# Altium PCB ISC.PcbDoc (part 3 of 3)
Units mm, origin at the board's own origin, x right, y up, seen from the top; angles counter-clockwise.
Board outline 152.4 x 101.6 mm, 2 copper layers (Top Layer, Bottom Layer); 689 components, 715 nets, 2378 pads, 0 vias.
Unrouted connection lines stored in the file: 1379.
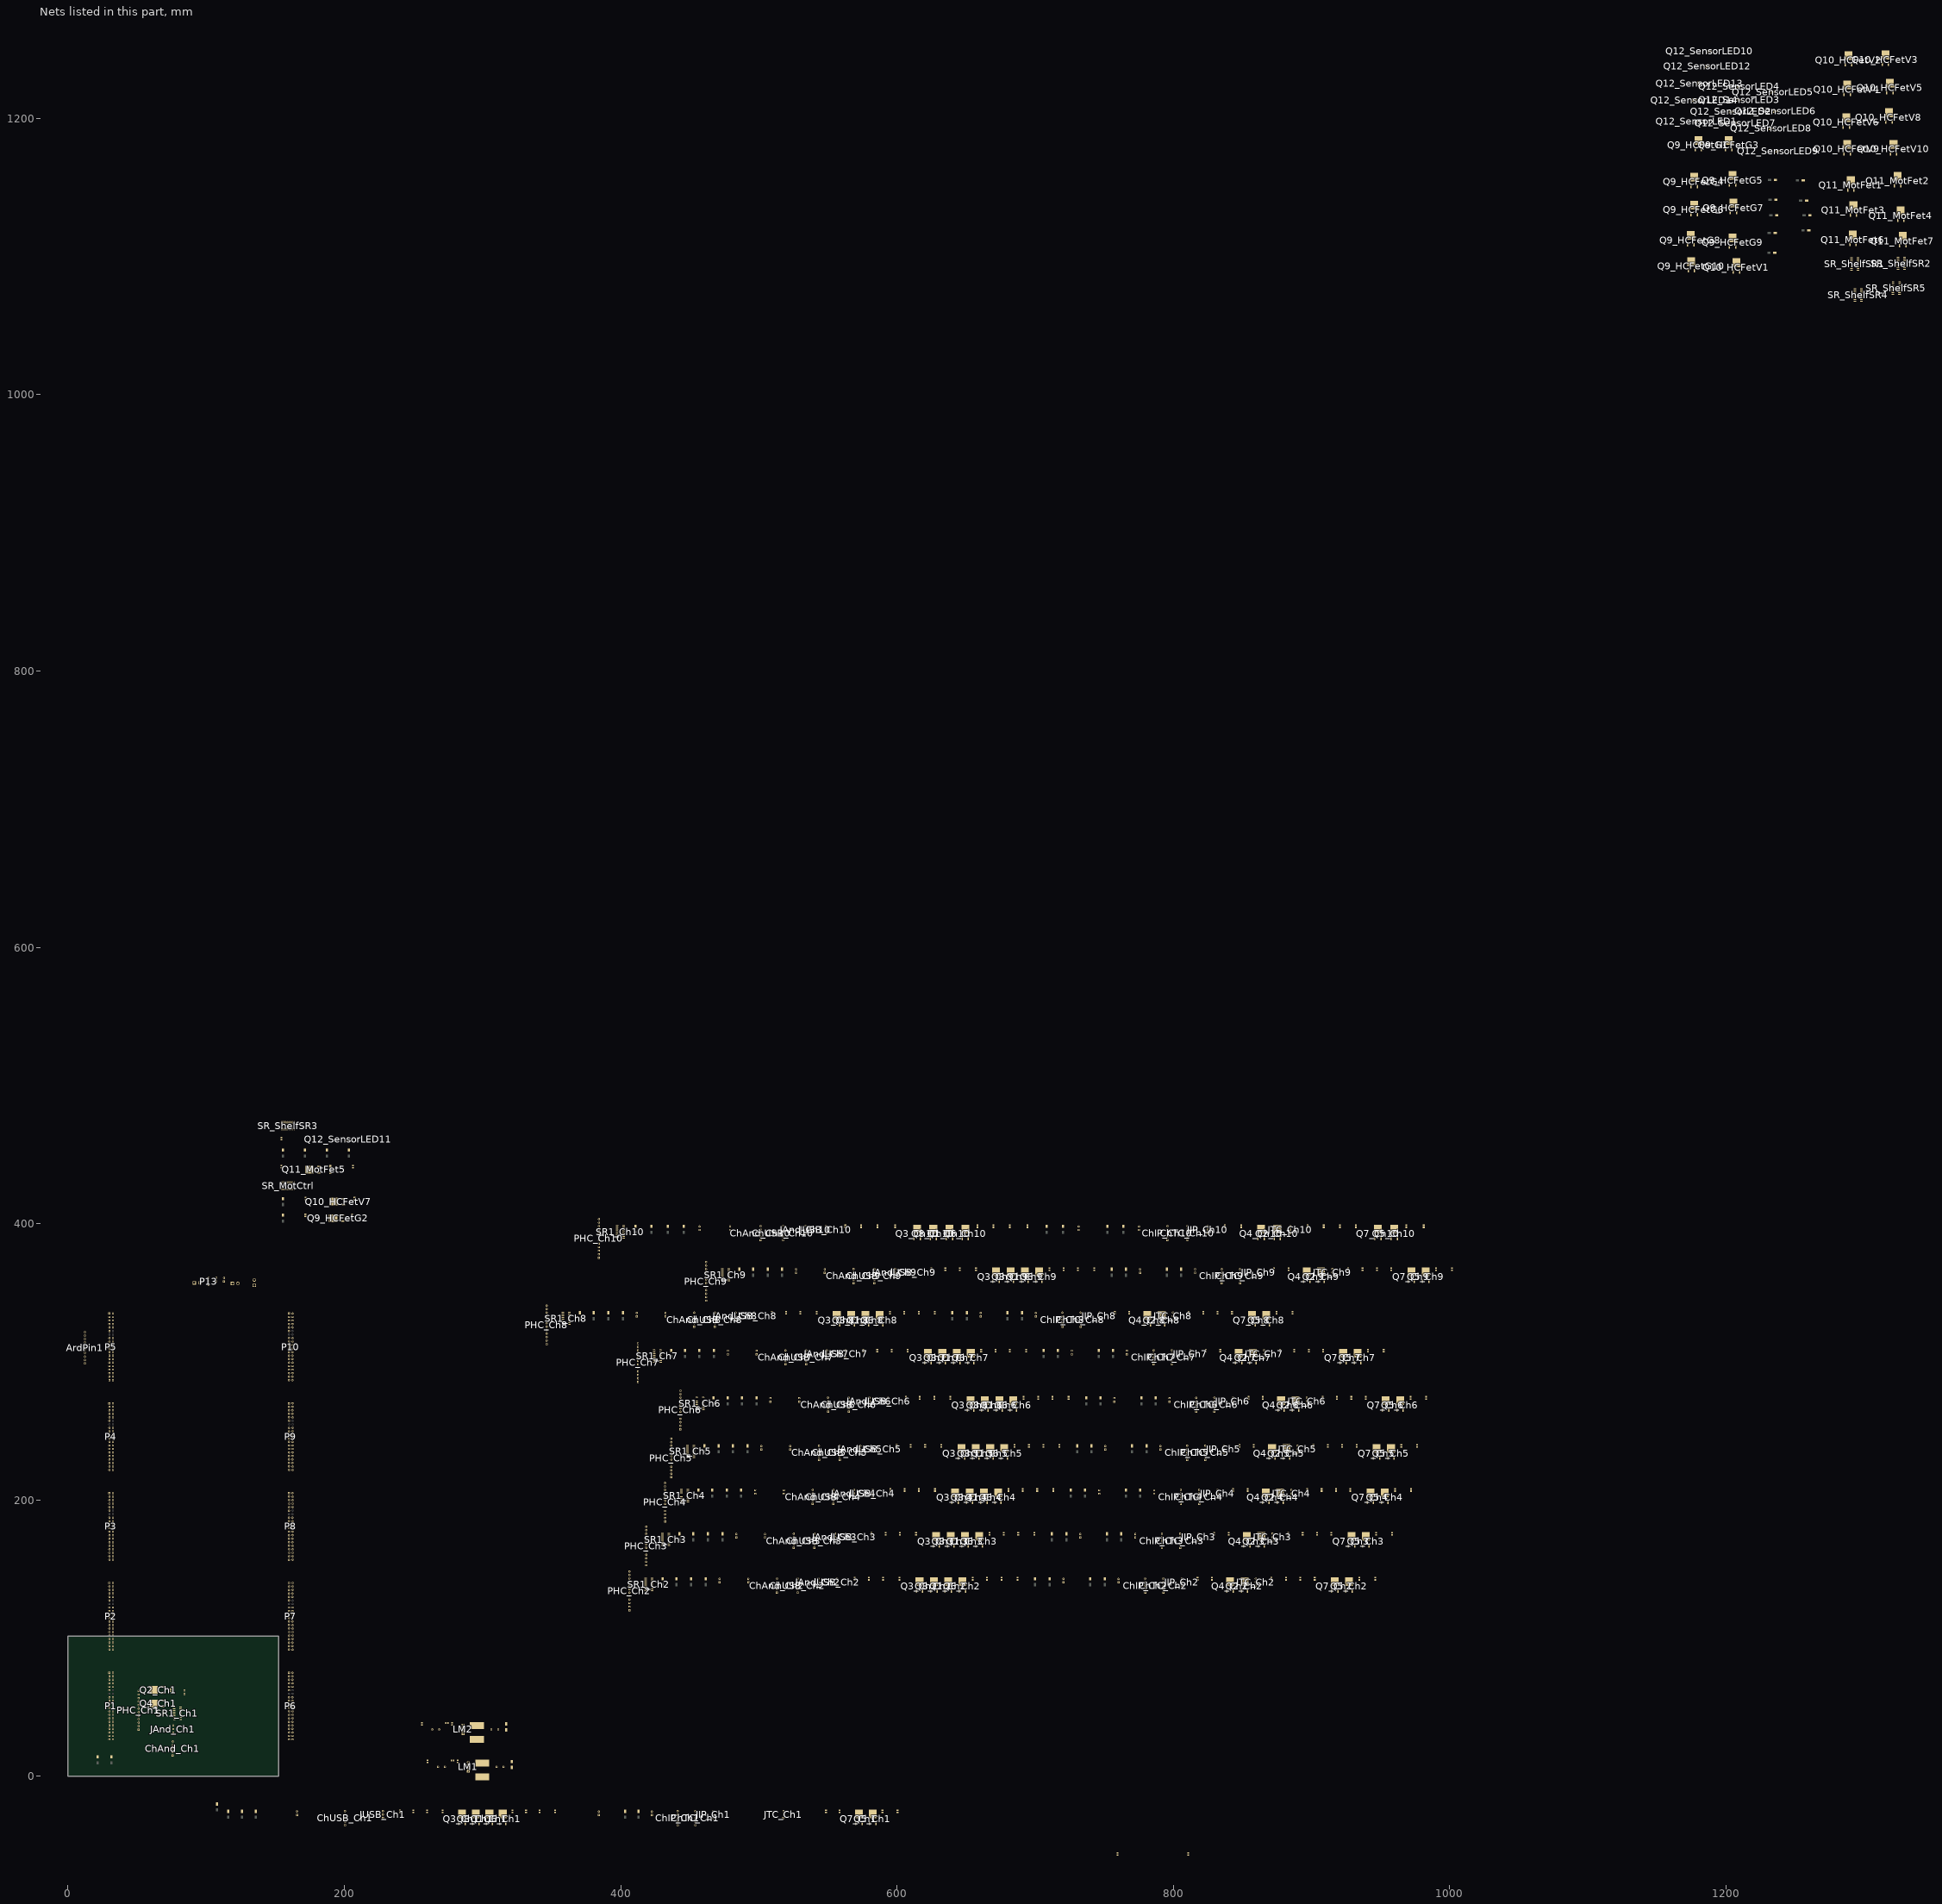
[diagram p3: the nets of this part, all layers, seen from the top]

## Part data
5VSupply 12VSupply: "3.96 EP HDR ASSY 2P_GREEN_", Package=None, Availability=Unavailable, Centerline_Pitch="3.96 mm[.156 in]", EU_RoHS_Compliance=Compliant, MF="TE Connectivity", MP=6-1123723-2, Number_of_Positions=2, Price=None, Product_Type=Header, SnapEDA_Link=https://www.snapeda.com/parts/6-1123723-2/TE%20Connectivity%20AMP%20Connectors/view-part/?ref=snap, TE_purchase_URL=https://www.te.com/usa-en/product-6-1123723-2.html?te_bu=Cor&te_type=disp&te_campaign=seda_glo_cor-seda-global-disp-prtnr-fy19-seda-model-bom-cta_sma-317_1&elqCampaignId=32493
ACSout1: library part 6-1123723-2, "3.96 EP HDR ASSY 2P_GREEN_", Package=None, Availability=Unavailable, Centerline_Pitch="3.96 mm[.156 in]", EU_RoHS_Compliance=Compliant, MF="TE Connectivity", MP=6-1123723-2, Number_of_Positions=2, Price=None, Product_Type=Header, SnapEDA_Link=https://www.snapeda.com/parts/6-1123723-2/TE%20Connectivity%20AMP%20Connectors/view-part/?ref=snap, TE_purchase_URL=https://www.te.com/usa-en/product-6-1123723-2.html?te_bu=Cor&te_type=disp&te_campaign=seda_glo_cor-seda-global-disp-prtnr-fy19-seda-model-bom-cta_sma-317_1&elqCampaignId=32493
ArdPin1: "Header, 10-Pin", LatestRevisionDate=17-Jul-2002, LatestRevisionNote="Re-released for DXP Platform.", Publisher="Altium Limited"
C1 C2 C4 C5: library part CAP, ="Cap 7.6mm"
C3 C6: library part "CAP NON", ="Cap non 2.54mm"
ChAnd_Ch1 ChAnd_Ch2 ChAnd_Ch3 ChAnd_Ch4 ChAnd_Ch5 ChAnd_Ch6 ChAnd_Ch7 ChAnd_Ch8 ChAnd_Ch9 ChAnd_Ch10 ChIP_Ch1 ChIP_Ch2 ChIP_Ch3 ChIP_Ch4 ChIP_Ch5 ChIP_Ch6 ChIP_Ch7 ChIP_Ch8 ChIP_Ch9 ChIP_Ch10 ChTC_Ch1 ChTC_Ch2 ChTC_Ch3 ChTC_Ch4 ChTC_Ch5 ChTC_Ch6 ChTC_Ch7 ChTC_Ch8 ChTC_Ch9 ChTC_Ch10 ChUSB_Ch1 ChUSB_Ch2 ChUSB_Ch3 ChUSB_Ch4 ChUSB_Ch5 ChUSB_Ch6 ChUSB_Ch7 ChUSB_Ch8 ChUSB_Ch9 ChUSB_Ch10: "жСжПн ЗТ ФЗСЋС ЗдПСжннП", LatestRevisionDate=17-Jul-2002, LatestRevisionNote="Re-released for DXP Platform.", Publisher="Altium Limited"
D1_Ch1 D1_Ch2 D1_Ch3 D1_Ch4 D1_Ch5 D1_Ch6 D1_Ch7 D1_Ch8 D1_Ch9 D1_Ch10 D2_Ch1 D2_Ch2 D2_Ch3 D2_Ch4 D2_Ch5 D2_Ch6 D2_Ch7 D2_Ch8 D2_Ch9 D2_Ch10 D3_Ch1 D3_Ch2 D3_Ch3 D3_Ch4 D3_Ch5 D3_Ch6 D3_Ch7 D3_Ch8 D3_Ch9 D3_Ch10 D4_Ch1 D4_Ch2 D4_Ch3 D4_Ch4 D4_Ch5 D4_Ch6 D4_Ch7 D4_Ch8 D4_Ch9 D4_Ch10 D5_Ch1 D5_Ch2 D5_Ch3 D5_Ch4 D5_Ch5 D5_Ch6 D5_Ch7 D5_Ch8 D5_Ch9 D5_Ch10 D6_Ch1 D6_Ch2 D6_Ch3 D6_Ch4 D6_Ch5 D6_Ch6 D6_Ch7 D6_Ch8 D6_Ch9 D6_Ch10 D7_Ch1 D7_Ch2 D7_Ch3 D7_Ch4 D7_Ch5 D7_Ch6 D7_Ch7 D7_Ch8 D7_Ch9 D7_Ch10 D8_Ch1 D8_Ch2 D8_Ch3 D8_Ch4 D8_Ch5 D8_Ch6 D8_Ch7 D8_Ch8 D8_Ch9 D8_Ch10 D11_HCFetG1 D11_HCFetG2 D11_HCFetG3 D11_HCFetG4 D11_HCFetG5 D11_HCFetG6 D11_HCFetG7 D11_HCFetG8 D11_HCFetG9 D11_HCFetG10 D12_HCFetV1 D12_HCFetV2 D12_HCFetV3 D12_HCFetV4 D12_HCFetV5 D12_HCFetV6 D12_HCFetV7 D12_HCFetV8 D12_HCFetV9 D12_HCFetV10 D14_SenIn1 D14_SenIn2 D14_SenIn3 D14_SenIn4 D14_SenIn5 D14_SenIn6 D14_SenIn7 D14_SenIn8 D14_SenIn9 D14_SenIn10 D15_SenIn1 D15_SenIn2 D15_SenIn3 D15_SenIn4 D15_SenIn5 D15_SenIn6 D15_SenIn7 D15_SenIn8 D15_SenIn9 D15_SenIn10 D16_SenIn1 D16_SenIn2 D16_SenIn3 D16_SenIn4 D16_SenIn5 D16_SenIn6 D16_SenIn7 D16_SenIn8 D16_SenIn9 D16_SenIn10 D17_SenIn1 D17_SenIn2 D17_SenIn3 D17_SenIn4 D17_SenIn5 D17_SenIn6 D17_SenIn7 D17_SenIn8 D17_SenIn9 D17_SenIn10: library part STPS2L60A, "SCHOTTKY RECTIFIER 2A; Voltage Vrrm: 60V; Diode Case Style: DO-214AC; Case Style: DO-214AC", Package="DO-214 STMicroelectronics", Availability=Unavailable, MF=STMicroelectronics, MP=STPS2L60A, Price=None, SnapEDA_Link=https://www.snapeda.com/parts/STPS2L60A/STMicroelectronics/view-part/?ref=snap
D9 D10 D13_MotFet1 D13_MotFet2 D13_MotFet3 D13_MotFet4 D13_MotFet5 D13_MotFet6 D13_MotFet7: "S1 Series 1000 V 1 A 1 uA Surface Mount General Purpose Rectifier - DO-214AC", Package="DO-214AC-214 ON Semiconductor", Availability=Unavailable, MF="ON Semiconductor", MP=S1M, Price=None, SnapEDA_Link=https://www.snapeda.com/parts/S1M/ON%20Semiconductor/view-part/?ref=snap
JAnd_Ch1 JAnd_Ch2 JAnd_Ch3 JAnd_Ch4 JAnd_Ch5 JAnd_Ch6 JAnd_Ch7 JAnd_Ch8 JAnd_Ch9 JAnd_Ch10 JIP_Ch1 JIP_Ch2 JIP_Ch3 JIP_Ch4 JIP_Ch5 JIP_Ch6 JIP_Ch7 JIP_Ch8 JIP_Ch9 JIP_Ch10 JTC_Ch1 JTC_Ch2 JTC_Ch3 JTC_Ch4 JTC_Ch5 JTC_Ch6 JTC_Ch7 JTC_Ch8 JTC_Ch9 JTC_Ch10 JUSB_Ch1 JUSB_Ch2 JUSB_Ch3 JUSB_Ch4 JUSB_Ch5 JUSB_Ch6 JUSB_Ch7 JUSB_Ch8 JUSB_Ch9 JUSB_Ch10: "МЗгЃС ЗдКОЗИ Инд 5 ЛЗИК ОСжМн (гдИЪ КЫРне ЛЗИК) нЗ ЗдКОЗИ ОСжМн ФЗСЋС ИСЗн ЮЭУе", LatestRevisionDate=17-Jul-2002, LatestRevisionNote="Re-released for DXP Platform.", Publisher="Altium Limited"
L1 L2: library part Inductor, "Inductor", ="Inductor 26.8mm"
LM1 LM2: library part MOSFET-N3, "Two-Gate, N-Channel MOSFET, Externally Terminated Substrate", Code_JEDEC=TS-001-AA, LatestRevisionDate=17-Jul-2002, LatestRevisionNote="Re-released for DXP Platform.", PackageDescription="TO-220, Molded, 5 Lead, Straight", PackageReference=T05A, Published=24-Mar-1999, Publisher="Altium Limited"
optSupAnd_Ch1 optSupAnd_Ch2 optSupAnd_Ch3 optSupAnd_Ch4 optSupAnd_Ch5 optSupAnd_Ch6 optSupAnd_Ch7 optSupAnd_Ch8 optSupAnd_Ch9 optSupAnd_Ch10 optSupIP_Ch1 optSupIP_Ch2 optSupIP_Ch3 optSupIP_Ch4 optSupIP_Ch5 optSupIP_Ch6 optSupIP_Ch7 optSupIP_Ch8 optSupIP_Ch9 optSupIP_Ch10 optSupTC_Ch1 optSupTC_Ch2 optSupTC_Ch3 optSupTC_Ch4 optSupTC_Ch5 optSupTC_Ch6 optSupTC_Ch7 optSupTC_Ch8 optSupTC_Ch9 optSupTC_Ch10 optSupUSB_Ch1 optSupUSB_Ch2 optSupUSB_Ch3 optSupUSB_Ch4 optSupUSB_Ch5 optSupUSB_Ch6 optSupUSB_Ch7 optSupUSB_Ch8 optSupUSB_Ch9 optSupUSB_Ch10: "ЗђС ФЗСЋС жСжПн 12 жбК ПЗФКе ИЗФП Знд МЗгЃС 12 жбК ИЗнУКн жХб ФжП", LatestRevisionDate=17-Jul-2002, LatestRevisionNote="Re-released for DXP Platform.", Publisher="Altium Limited"
P1 P2 P3 P4 P5 P6 P7 P8 P9 P10: "Header, 20-Pin, Dual row", LatestRevisionDate=17-Jul-2002, LatestRevisionNote="Re-released for DXP Platform.", Publisher="Altium Limited"
P11 P12: library part "Header 2", "Header, 2-Pin", LatestRevisionDate=17-Jul-2002, LatestRevisionNote="Re-released for DXP Platform.", Publisher="Altium Limited"
P13: library part "Header 3", "Header, 3-Pin", LatestRevisionDate=17-Jul-2002, LatestRevisionNote="Re-released for DXP Platform.", Publisher="Altium Limited"
PHC_Ch1 PHC_Ch2 PHC_Ch3 PHC_Ch4 PHC_Ch5 PHC_Ch6 PHC_Ch7 PHC_Ch8 PHC_Ch9 PHC_Ch10: "Header, 12-Pin", LatestRevisionDate=17-Jul-2002, LatestRevisionNote="Re-released for DXP Platform.", Publisher="Altium Limited"
Q1_Ch1 Q1_Ch2 Q1_Ch3 Q1_Ch4 Q1_Ch5 Q1_Ch6 Q1_Ch7 Q1_Ch8 Q1_Ch9 Q1_Ch10 Q2_Ch1 Q2_Ch2 Q2_Ch3 Q2_Ch4 Q2_Ch5 Q2_Ch6 Q2_Ch7 Q2_Ch8 Q2_Ch9 Q2_Ch10 Q3_Ch1 Q3_Ch2 Q3_Ch3 Q3_Ch4 Q3_Ch5 Q3_Ch6 Q3_Ch7 Q3_Ch8 Q3_Ch9 Q3_Ch10 Q4_Ch1 Q4_Ch2 Q4_Ch3 Q4_Ch4 Q4_Ch5 Q4_Ch6 Q4_Ch7 Q4_Ch8 Q4_Ch9 Q4_Ch10 Q5_Ch1 Q5_Ch2 Q5_Ch3 Q5_Ch4 Q5_Ch5 Q5_Ch6 Q5_Ch7 Q5_Ch8 Q5_Ch9 Q5_Ch10 Q6_Ch1 Q6_Ch2 Q6_Ch3 Q6_Ch4 Q6_Ch5 Q6_Ch6 Q6_Ch7 Q6_Ch8 Q6_Ch9 Q6_Ch10 Q7_Ch1 Q7_Ch2 Q7_Ch3 Q7_Ch4 Q7_Ch5 Q7_Ch6 Q7_Ch7 Q7_Ch8 Q7_Ch9 Q7_Ch10 Q8_Ch1 Q8_Ch2 Q8_Ch3 Q8_Ch4 Q8_Ch5 Q8_Ch6 Q8_Ch7 Q8_Ch8 Q8_Ch9 Q8_Ch10 Q9_HCFetG1 Q9_HCFetG2 Q9_HCFetG3 Q9_HCFetG4 Q9_HCFetG5 Q9_HCFetG6 Q9_HCFetG7 Q9_HCFetG8 Q9_HCFetG9 Q9_HCFetG10 Q10_HCFetV1 Q10_HCFetV2 Q10_HCFetV3 Q10_HCFetV4 Q10_HCFetV5 Q10_HCFetV6 Q10_HCFetV7 Q10_HCFetV8 Q10_HCFetV9 Q10_HCFetV10 Q11_MotFet1 Q11_MotFet2 Q11_MotFet3 Q11_MotFet4 Q11_MotFet5 Q11_MotFet6 Q11_MotFet7: library part IPD50P04P4L-11, "P-Channel 40 V 10.6 mOhm OptiMOS®-P2 Power-Transistor -PG-TO-252-3", Package="TO-252-3 Infineon", Availability=Unavailable, MF="Infineon Technologies", MP=IPD50P04P4L-11, Price=None, SnapEDA_Link=https://www.snapeda.com/parts/IPD50P04P4L-11/Infineon%20Technologies/view-part/?ref=snap
Q12_SensorLED1 Q12_SensorLED2 Q12_SensorLED3 Q12_SensorLED4 Q12_SensorLED5 Q12_SensorLED6 Q12_SensorLED7 Q12_SensorLED8 Q12_SensorLED9 Q12_SensorLED10 Q12_SensorLED11 Q12_SensorLED12 Q12_SensorLED13 Q12_SensorLED14: library part MOSFET-P, "P-Channel MOSFET", LatestRevisionDate=17-Jul-2002, LatestRevisionNote="Re-released for DXP Platform.", PackageDescription="TO, Flat Index; 3 In-Line, Axial Leads; Body Dia. 4.6mm; Lead Dia. 0.5 mm (max)", PackageReference=E3, PackageVersion=1995/1996, Published=8-Jun-2000, Publisher="Altium Limited"
R1_Ch1 R1_Ch2 R1_Ch3 R1_Ch4 R1_Ch5 R1_Ch6 R1_Ch7 R1_Ch8 R1_Ch9 R1_Ch10 R2_Ch1 R2_Ch2 R2_Ch3 R2_Ch4 R2_Ch5 R2_Ch6 R2_Ch7 R2_Ch8 R2_Ch9 R2_Ch10 R3_Ch1 R3_Ch2 R3_Ch3 R3_Ch4 R3_Ch5 R3_Ch6 R3_Ch7 R3_Ch8 R3_Ch9 R3_Ch10 R4_Ch1 R4_Ch2 R4_Ch3 R4_Ch4 R4_Ch5 R4_Ch6 R4_Ch7 R4_Ch8 R4_Ch9 R4_Ch10 R5_Ch1 R5_Ch2 R5_Ch3 R5_Ch4 R5_Ch5 R5_Ch6 R5_Ch7 R5_Ch8 R5_Ch9 R5_Ch10 R6_Ch1 R6_Ch2 R6_Ch3 R6_Ch4 R6_Ch5 R6_Ch6 R6_Ch7 R6_Ch8 R6_Ch9 R6_Ch10 R7_Ch1 R7_Ch2 R7_Ch3 R7_Ch4 R7_Ch5 R7_Ch6 R7_Ch7 R7_Ch8 R7_Ch9 R7_Ch10 R8_Ch1 R8_Ch2 R8_Ch3 R8_Ch4 R8_Ch5 R8_Ch6 R8_Ch7 R8_Ch8 R8_Ch9 R8_Ch10 R9_Ch1 R9_Ch2 R9_Ch3 R9_Ch4 R9_Ch5 R9_Ch6 R9_Ch7 R9_Ch8 R9_Ch9 R9_Ch10 R10_Ch1 R10_Ch2 R10_Ch3 R10_Ch4 R10_Ch5 R10_Ch6 R10_Ch7 R10_Ch8 R10_Ch9 R10_Ch10 R11_Ch1 R11_Ch2 R11_Ch3 R11_Ch4 R11_Ch5 R11_Ch6 R11_Ch7 R11_Ch8 R11_Ch9 R11_Ch10 R12_Ch1 R12_Ch2 R12_Ch3 R12_Ch4 R12_Ch5 R12_Ch6 R12_Ch7 R12_Ch8 R12_Ch9 R12_Ch10 R13_Ch1 R13_Ch2 R13_Ch3 R13_Ch4 R13_Ch5 R13_Ch6 R13_Ch7 R13_Ch8 R13_Ch9 R13_Ch10 R14_Ch1 R14_Ch2 R14_Ch3 R14_Ch4 R14_Ch5 R14_Ch6 R14_Ch7 R14_Ch8 R14_Ch9 R14_Ch10 R15_Ch1 R15_Ch2 R15_Ch3 R15_Ch4 R15_Ch5 R15_Ch6 R15_Ch7 R15_Ch8 R15_Ch9 R15_Ch10 R16_Ch1 R16_Ch2 R16_Ch3 R16_Ch4 R16_Ch5 R16_Ch6 R16_Ch7 R16_Ch8 R16_Ch9 R16_Ch10 R21_HCFetG1 R21_HCFetG2 R21_HCFetG3 R21_HCFetG4 R21_HCFetG5 R21_HCFetG6 R21_HCFetG7 R21_HCFetG8 R21_HCFetG9 R21_HCFetG10 R22_HCFetG1 R22_HCFetG2 R22_HCFetG3 R22_HCFetG4 R22_HCFetG5 R22_HCFetG6 R22_HCFetG7 R22_HCFetG8 R22_HCFetG9 R22_HCFetG10 R23_HCFetV1 R23_HCFetV2 R23_HCFetV3 R23_HCFetV4 R23_HCFetV5 R23_HCFetV6 R23_HCFetV7 R23_HCFetV8 R23_HCFetV9 R23_HCFetV10 R24_HCFetV1 R24_HCFetV2 R24_HCFetV3 R24_HCFetV4 R24_HCFetV5 R24_HCFetV6 R24_HCFetV7 R24_HCFetV8 R24_HCFetV9 R24_HCFetV10 R25_MotFet1 R25_MotFet2 R25_MotFet3 R25_MotFet4 R25_MotFet5 R25_MotFet6 R25_MotFet7 R26_MotFet1 R26_MotFet2 R26_MotFet3 R26_MotFet4 R26_MotFet5 R26_MotFet6 R26_MotFet7 R27_SensorLED1 R27_SensorLED2 R27_SensorLED3 R27_SensorLED4 R27_SensorLED5 R27_SensorLED6 R27_SensorLED7 R27_SensorLED8 R27_SensorLED9 R27_SensorLED10 R27_SensorLED11 R27_SensorLED12 R27_SensorLED13 R27_SensorLED14 R28_SensorLED1 R28_SensorLED2 R28_SensorLED3 R28_SensorLED4 R28_SensorLED5 R28_SensorLED6 R28_SensorLED7 R28_SensorLED8 R28_SensorLED9 R28_SensorLED10 R28_SensorLED11 R28_SensorLED12 R28_SensorLED13 R28_SensorLED14: library part Res1, "Resistor", LatestRevisionDate=17-Jul-2002, LatestRevisionNote="Re-released for DXP Platform.", PackageDescription="Axial Device, Thru-Hole; 2 Leads; 0.3 in Pin Spacing", PackageReference=AXIAL-0.3, Published=8-Jun-2000, Publisher="Altium Limited"
R17 R18 R19 R20: library part RESISTOR, ="Res 0603"
SR1_Ch1 SR1_Ch2 SR1_Ch3 SR1_Ch4 SR1_Ch5 SR1_Ch6 SR1_Ch7 SR1_Ch8 SR1_Ch9 SR1_Ch10 SR_MotCtrl SR_ShelfSR1 SR_ShelfSR2 SR_ShelfSR3 SR_ShelfSR4 SR_ShelfSR5: library part "Res Pack3", "Isolated Resistor Network", Code_IPC=SOIC127P600-16, Code_JEDEC=MS-012-AC, LatestRevisionDate=29-May-2009, LatestRevisionNote="IPC-7351 Footprint Added.", PackageDescription="16-Pin Small Outline Integrated Circuit 1.27 mm Pitch", PackageReference=SO-16, Published=24-Mar-1999, Publisher="Altium Limited"

## Nets (pads, with @x,y where several pads share a name; then routed paths per layer and width w, separated by ;. In a path a pad name is that pad's centre, name@x,y a point inside that pad or via, vN(x,y) a via of type N, cw(c..) or ccw(c..) an arc to the next point about the centre after c; other vN are vias at no path point)
2V: C2.2 C3.2 L1.2 Q10_HCFetV1.3 Q10_HCFetV2.3 Q10_HCFetV3.3 Q10_HCFetV6.3 Q10_HCFetV7.3 Q10_HCFetV8.3 Q12_SensorLED1.2 Q12_SensorLED2.2 Q12_SensorLED3.2 Q12_SensorLED4.2 Q12_SensorLED5.2 Q12_SensorLED7.2 Q12_SensorLED8.2 Q12_SensorLED9.2 Q12_SensorLED10.2 Q12_SensorLED11.2 Q12_SensorLED12.2 Q12_SensorLED14.2 R18.1
3.3V: C5.2 C6.2 L2.2 Q12_SensorLED6.2 Q12_SensorLED13.2 R20.1
5V: 5VSupply.2 C1.1 C4.1 JAnd_Ch1.3 JAnd_Ch2.3 JAnd_Ch3.3 JAnd_Ch4.3 JAnd_Ch5.3 JAnd_Ch6.3 JAnd_Ch7.3 JAnd_Ch8.3 JAnd_Ch9.3 JAnd_Ch10.3 JIP_Ch1.3 JIP_Ch2.3 JIP_Ch3.3 JIP_Ch4.3 JIP_Ch5.3 JIP_Ch6.3 JIP_Ch7.3 JIP_Ch8.3 JIP_Ch9.3 JIP_Ch10.3 JTC_Ch1.3 JTC_Ch2.3 JTC_Ch3.3 JTC_Ch4.3 JTC_Ch5.3 JTC_Ch6.3 JTC_Ch7.3 JTC_Ch8.3 JTC_Ch9.3 JTC_Ch10.3 JUSB_Ch1.3 JUSB_Ch2.3 JUSB_Ch3.3 JUSB_Ch4.3 JUSB_Ch5.3 JUSB_Ch6.3 JUSB_Ch7.3 JUSB_Ch8.3 JUSB_Ch9.3 JUSB_Ch10.3 LM1.1 LM2.1 P11.2 P12.2 SR1_Ch1.10 SR1_Ch1.16 SR1_Ch2.10 SR1_Ch2.16 SR1_Ch3.10 SR1_Ch3.16 SR1_Ch4.10 SR1_Ch4.16 SR1_Ch5.10 SR1_Ch5.16 SR1_Ch6.10 SR1_Ch6.16 SR1_Ch7.10 SR1_Ch7.16 SR1_Ch8.10 SR1_Ch8.16 SR1_Ch9.10 SR1_Ch9.16 SR1_Ch10.10 SR1_Ch10.16 SR_MotCtrl.10 SR_MotCtrl.16 SR_ShelfSR1.10 SR_ShelfSR1.16 SR_ShelfSR2.10 SR_ShelfSR2.16 SR_ShelfSR3.10 SR_ShelfSR3.16 SR_ShelfSR4.10 SR_ShelfSR4.16 SR_ShelfSR5.10 SR_ShelfSR5.16
12V: 12VSupply.2 optSupAnd_Ch1.1 optSupAnd_Ch2.1 optSupAnd_Ch3.1 optSupAnd_Ch4.1 optSupAnd_Ch5.1 optSupAnd_Ch6.1 optSupAnd_Ch7.1 optSupAnd_Ch8.1 optSupAnd_Ch9.1 optSupAnd_Ch10.1 optSupIP_Ch1.1 optSupIP_Ch2.1 optSupIP_Ch3.1 optSupIP_Ch4.1 optSupIP_Ch5.1 optSupIP_Ch6.1 optSupIP_Ch7.1 optSupIP_Ch8.1 optSupIP_Ch9.1 optSupIP_Ch10.1 optSupTC_Ch1.1 optSupTC_Ch2.1 optSupTC_Ch3.1 optSupTC_Ch4.1 optSupTC_Ch5.1 optSupTC_Ch6.1 optSupTC_Ch7.1 optSupTC_Ch8.1 optSupTC_Ch9.1 optSupTC_Ch10.1 optSupUSB_Ch1.1 optSupUSB_Ch2.1 optSupUSB_Ch3.1 optSupUSB_Ch4.1 optSupUSB_Ch5.1 optSupUSB_Ch6.1 optSupUSB_Ch7.1 optSupUSB_Ch8.1 optSupUSB_Ch9.1 optSupUSB_Ch10.1 Q10_HCFetV4.3 Q10_HCFetV5.3 Q10_HCFetV9.3 Q10_HCFetV10.3
AndGND_Ch1: PHC_Ch1.1
AndGND_Ch2: PHC_Ch2.1
AndGND_Ch3: PHC_Ch3.1
AndGND_Ch4: PHC_Ch4.1
AndGND_Ch5: PHC_Ch5.1
AndGND_Ch6: PHC_Ch6.1
AndGND_Ch7: PHC_Ch7.1
AndGND_Ch8: PHC_Ch8.1
AndGND_Ch9: PHC_Ch9.1
AndGND_Ch10: PHC_Ch10.1
AndVCC_Ch1: JAnd_Ch1.2 PHC_Ch1.2
AndVCC_Ch2: JAnd_Ch2.2 PHC_Ch2.2
AndVCC_Ch3: JAnd_Ch3.2 PHC_Ch3.2
AndVCC_Ch4: JAnd_Ch4.2 PHC_Ch4.2
AndVCC_Ch5: JAnd_Ch5.2 PHC_Ch5.2
AndVCC_Ch6: JAnd_Ch6.2 PHC_Ch6.2
AndVCC_Ch7: JAnd_Ch7.2 PHC_Ch7.2
AndVCC_Ch8: JAnd_Ch8.2 PHC_Ch8.2
AndVCC_Ch9: JAnd_Ch9.2 PHC_Ch9.2
AndVCC_Ch10: JAnd_Ch10.2 PHC_Ch10.2
ChAndVCC_Ch1: ChAnd_Ch1.1 JAnd_Ch1.1
ChAndVCC_Ch2: ChAnd_Ch2.1 JAnd_Ch2.1
ChAndVCC_Ch3: ChAnd_Ch3.1 JAnd_Ch3.1
ChAndVCC_Ch4: ChAnd_Ch4.1 JAnd_Ch4.1
ChAndVCC_Ch5: ChAnd_Ch5.1 JAnd_Ch5.1
ChAndVCC_Ch6: ChAnd_Ch6.1 JAnd_Ch6.1
ChAndVCC_Ch7: ChAnd_Ch7.1 JAnd_Ch7.1
ChAndVCC_Ch8: ChAnd_Ch8.1 JAnd_Ch8.1
ChAndVCC_Ch9: ChAnd_Ch9.1 JAnd_Ch9.1
ChAndVCC_Ch10: ChAnd_Ch10.1 JAnd_Ch10.1
ChIPVCC_Ch1: ChIP_Ch1.1 JIP_Ch1.1
ChIPVCC_Ch2: ChIP_Ch2.1 JIP_Ch2.1
ChIPVCC_Ch3: ChIP_Ch3.1 JIP_Ch3.1
ChIPVCC_Ch4: ChIP_Ch4.1 JIP_Ch4.1
ChIPVCC_Ch5: ChIP_Ch5.1 JIP_Ch5.1
ChIPVCC_Ch6: ChIP_Ch6.1 JIP_Ch6.1
ChIPVCC_Ch7: ChIP_Ch7.1 JIP_Ch7.1
ChIPVCC_Ch8: ChIP_Ch8.1 JIP_Ch8.1
ChIPVCC_Ch9: ChIP_Ch9.1 JIP_Ch9.1
ChIPVCC_Ch10: ChIP_Ch10.1 JIP_Ch10.1
ChTCVCC_Ch1: ChTC_Ch1.1 JTC_Ch1.1
ChTCVCC_Ch2: ChTC_Ch2.1 JTC_Ch2.1
ChTCVCC_Ch3: ChTC_Ch3.1 JTC_Ch3.1
ChTCVCC_Ch4: ChTC_Ch4.1 JTC_Ch4.1
ChTCVCC_Ch5: ChTC_Ch5.1 JTC_Ch5.1
ChTCVCC_Ch6: ChTC_Ch6.1 JTC_Ch6.1
ChTCVCC_Ch7: ChTC_Ch7.1 JTC_Ch7.1
ChTCVCC_Ch8: ChTC_Ch8.1 JTC_Ch8.1
ChTCVCC_Ch9: ChTC_Ch9.1 JTC_Ch9.1
ChTCVCC_Ch10: ChTC_Ch10.1 JTC_Ch10.1
ChUSBVCC_Ch1: ChUSB_Ch1.1 JUSB_Ch1.1
ChUSBVCC_Ch2: ChUSB_Ch2.1 JUSB_Ch2.1
ChUSBVCC_Ch3: ChUSB_Ch3.1 JUSB_Ch3.1
ChUSBVCC_Ch4: ChUSB_Ch4.1 JUSB_Ch4.1
ChUSBVCC_Ch5: ChUSB_Ch5.1 JUSB_Ch5.1
ChUSBVCC_Ch6: ChUSB_Ch6.1 JUSB_Ch6.1
ChUSBVCC_Ch7: ChUSB_Ch7.1 JUSB_Ch7.1
ChUSBVCC_Ch8: ChUSB_Ch8.1 JUSB_Ch8.1
ChUSBVCC_Ch9: ChUSB_Ch9.1 JUSB_Ch9.1
ChUSBVCC_Ch10: ChUSB_Ch10.1 JUSB_Ch10.1
Data+And1: ChAnd_Ch1.3 P1.33
Data+And2: ChAnd_Ch2.3 P2.33
Data+And3: ChAnd_Ch3.3 P3.33
Data+And4: ChAnd_Ch4.3 P4.33
Data+And5: ChAnd_Ch5.3 P5.33
Data+And6: ChAnd_Ch6.3 P6.33
Data+And7: ChAnd_Ch7.3 P7.33
Data+And8: ChAnd_Ch8.3 P8.33
Data+And9: ChAnd_Ch9.3 P9.33
Data+And10: ChAnd_Ch10.3 P10.33
Data+IP1: ChIP_Ch1.3 P1.35
Data+IP2: ChIP_Ch2.3 P2.35
Data+IP3: ChIP_Ch3.3 P3.35
Data+IP4: ChIP_Ch4.3 P4.35
Data+IP5: ChIP_Ch5.3 P5.35
Data+IP6: ChIP_Ch6.3 P6.35
Data+IP7: ChIP_Ch7.3 P7.35
Data+IP8: ChIP_Ch8.3 P8.35
Data+IP9: ChIP_Ch9.3 P9.35
Data+IP10: ChIP_Ch10.3 P10.35
Data+TC1: ChTC_Ch1.3 P1.37
Data+TC2: ChTC_Ch2.3 P2.37
Data+TC3: ChTC_Ch3.3 P3.37
Data+TC4: ChTC_Ch4.3 P4.37
Data+TC5: ChTC_Ch5.3 P5.37
Data+TC6: ChTC_Ch6.3 P6.37
Data+TC7: ChTC_Ch7.3 P7.37
Data+TC8: ChTC_Ch8.3 P8.37
Data+TC9: ChTC_Ch9.3 P9.37
Data+TC10: ChTC_Ch10.3 P10.37
Data+USB1: ChUSB_Ch1.3 P1.39
Data+USB2: ChUSB_Ch2.3 P2.39
Data+USB3: ChUSB_Ch3.3 P3.39
Data+USB4: ChUSB_Ch4.3 P4.39
Data+USB5: ChUSB_Ch5.3 P5.39
Data+USB6: ChUSB_Ch6.3 P6.39
Data+USB7: ChUSB_Ch7.3 P7.39
Data+USB8: ChUSB_Ch8.3 P8.39
Data+USB9: ChUSB_Ch9.3 P9.39
Data+USB10: ChUSB_Ch10.3 P10.39
Data-And1: ChAnd_Ch1.2 P1.34
Data-And2: ChAnd_Ch2.2 P2.34
Data-And3: ChAnd_Ch3.2 P3.34
Data-And4: ChAnd_Ch4.2 P4.34
Data-And5: ChAnd_Ch5.2 P5.34
Data-And6: ChAnd_Ch6.2 P6.34
Data-And7: ChAnd_Ch7.2 P7.34
Data-And8: ChAnd_Ch8.2 P8.34
Data-And9: ChAnd_Ch9.2 P9.34
Data-And10: ChAnd_Ch10.2 P10.34
Data-IP1: ChIP_Ch1.2 P1.36
Data-IP2: ChIP_Ch2.2 P2.36
Data-IP3: ChIP_Ch3.2 P3.36
Data-IP4: ChIP_Ch4.2 P4.36
Data-IP5: ChIP_Ch5.2 P5.36
Data-IP6: ChIP_Ch6.2 P6.36
Data-IP7: ChIP_Ch7.2 P7.36
Data-IP8: ChIP_Ch8.2 P8.36
Data-IP9: ChIP_Ch9.2 P9.36
Data-IP10: ChIP_Ch10.2 P10.36
Data-TC1: ChTC_Ch1.2 P1.38
Data-TC2: ChTC_Ch2.2 P2.38
Data-TC3: ChTC_Ch3.2 P3.38
Data-TC4: ChTC_Ch4.2 P4.38
Data-TC5: ChTC_Ch5.2 P5.38
Data-TC6: ChTC_Ch6.2 P6.38
Data-TC7: ChTC_Ch7.2 P7.38
Data-TC8: ChTC_Ch8.2 P8.38
Data-TC9: ChTC_Ch9.2 P9.38
Data-TC10: ChTC_Ch10.2 P10.38
Data-USB1: ChUSB_Ch1.2 P1.40
Data-USB2: ChUSB_Ch2.2 P2.40
Data-USB3: ChUSB_Ch3.2 P3.40
Data-USB4: ChUSB_Ch4.2 P4.40
Data-USB5: ChUSB_Ch5.2 P5.40
Data-USB6: ChUSB_Ch6.2 P6.40
Data-USB7: ChUSB_Ch7.2 P7.40
Data-USB8: ChUSB_Ch8.2 P8.40
Data-USB9: ChUSB_Ch9.2 P9.40
Data-USB10: ChUSB_Ch10.2 P10.40
DriverPin1: P13.2 Q11_MotFet6.3 Q11_MotFet7.3
DriverPin2: P13.3 Q11_MotFet1.3 Q11_MotFet2.3 Q11_MotFet3.3 Q11_MotFet4.3 Q11_MotFet5.3
DS_4: ArdPin1.4 SR_ShelfSR5.14
DS_7: ArdPin1.1 SR1_Ch1.14
DSSh2: SR_ShelfSR4.14 SR_ShelfSR5.9
DSSh3: SR_ShelfSR3.14 SR_ShelfSR4.9
DSSh4: SR_ShelfSR2.14 SR_ShelfSR3.9
DSSh5: SR_ShelfSR1.14 SR_ShelfSR2.9
F1-12V: P1.25 P2.25 P3.25 P4.25 P5.25
F2-12V: P6.25 P7.25 P8.25 P9.25 P10.25
GMAnd_Ch1: R6_Ch1.1 SR1_Ch1.1
GMAnd_Ch2: R6_Ch2.1 SR1_Ch2.1
GMAnd_Ch3: R6_Ch3.1 SR1_Ch3.1
GMAnd_Ch4: R6_Ch4.1 SR1_Ch4.1
GMAnd_Ch5: R6_Ch5.1 SR1_Ch5.1
GMAnd_Ch6: R6_Ch6.1 SR1_Ch6.1
GMAnd_Ch7: R6_Ch7.1 SR1_Ch7.1
GMAnd_Ch8: R6_Ch8.1 SR1_Ch8.1
GMAnd_Ch9: R6_Ch9.1 SR1_Ch9.1
GMAnd_Ch10: R6_Ch10.1 SR1_Ch10.1
GMIP_Ch1: R5_Ch1.1 SR1_Ch1.3
GMIP_Ch2: R5_Ch2.1 SR1_Ch2.3
GMIP_Ch3: R5_Ch3.1 SR1_Ch3.3
GMIP_Ch4: R5_Ch4.1 SR1_Ch4.3
GMIP_Ch5: R5_Ch5.1 SR1_Ch5.3
GMIP_Ch6: R5_Ch6.1 SR1_Ch6.3
GMIP_Ch7: R5_Ch7.1 SR1_Ch7.3
GMIP_Ch8: R5_Ch8.1 SR1_Ch8.3
GMIP_Ch9: R5_Ch9.1 SR1_Ch9.3
GMIP_Ch10: R5_Ch10.1 SR1_Ch10.3
GMTC_Ch1: R13_Ch1.1 SR1_Ch1.5
GMTC_Ch2: R13_Ch2.1 SR1_Ch2.5
GMTC_Ch3: R13_Ch3.1 SR1_Ch3.5
GMTC_Ch4: R13_Ch4.1 SR1_Ch4.5
GMTC_Ch5: R13_Ch5.1 SR1_Ch5.5
GMTC_Ch6: R13_Ch6.1 SR1_Ch6.5
GMTC_Ch7: R13_Ch7.1 SR1_Ch7.5
GMTC_Ch8: R13_Ch8.1 SR1_Ch8.5
GMTC_Ch9: R13_Ch9.1 SR1_Ch9.5
GMTC_Ch10: R13_Ch10.1 SR1_Ch10.5
GMUSB_Ch1: R14_Ch1.1 SR1_Ch1.7
GMUSB_Ch2: R14_Ch2.1 SR1_Ch2.7
GMUSB_Ch3: R14_Ch3.1 SR1_Ch3.7
GMUSB_Ch4: R14_Ch4.1 SR1_Ch4.7
GMUSB_Ch5: R14_Ch5.1 SR1_Ch5.7
GMUSB_Ch6: R14_Ch6.1 SR1_Ch6.7
GMUSB_Ch7: R14_Ch7.1 SR1_Ch7.7
GMUSB_Ch8: R14_Ch8.1 SR1_Ch8.7
GMUSB_Ch9: R14_Ch9.1 SR1_Ch9.7
GMUSB_Ch10: R14_Ch10.1 SR1_Ch10.7
GND_Ch1: 5VSupply.1 12VSupply.1 ACSout1.2 C1.2 C2.1 C4.2 C5.1 ChAnd_Ch1.4 ChAnd_Ch2.4 ChAnd_Ch3.4 ChAnd_Ch4.4 ChAnd_Ch5.4 ChAnd_Ch6.4 ChAnd_Ch7.4 ChAnd_Ch8.4 ChAnd_Ch9.4 ChAnd_Ch10.4 ChIP_Ch1.4 ChIP_Ch2.4 ChIP_Ch3.4 ChIP_Ch4.4 ChIP_Ch5.4 ChIP_Ch6.4 ChIP_Ch7.4 ChIP_Ch8.4 ChIP_Ch9.4 ChIP_Ch10.4 ChTC_Ch1.4 ChTC_Ch2.4 ChTC_Ch3.4 ChTC_Ch4.4 ChTC_Ch5.4 ChTC_Ch6.4 ChTC_Ch7.4 ChTC_Ch8.4 ChTC_Ch9.4 ChTC_Ch10.4 ChUSB_Ch1.4 ChUSB_Ch2.4 ChUSB_Ch3.4 ChUSB_Ch4.4 ChUSB_Ch5.4 ChUSB_Ch6.4 ChUSB_Ch7.4 ChUSB_Ch8.4 ChUSB_Ch9.4 ChUSB_Ch10.4 D9.A D10.A LM1.3 LM1.5 LM2.3 LM2.5 P11.1 P12.1 P13.1 Q1_Ch1.3 Q1_Ch2.3 Q1_Ch3.3 Q1_Ch4.3 Q1_Ch5.3 Q1_Ch6.3 Q1_Ch7.3 Q1_Ch8.3 Q1_Ch9.3 Q1_Ch10.3 Q2_Ch1.3 Q2_Ch2.3 Q2_Ch3.3 Q2_Ch4.3 Q2_Ch5.3 Q2_Ch6.3 Q2_Ch7.3 Q2_Ch8.3 Q2_Ch9.3 Q2_Ch10.3 Q5_Ch1.3 Q5_Ch2.3 Q5_Ch3.3 Q5_Ch4.3 Q5_Ch5.3 Q5_Ch6.3 Q5_Ch7.3 Q5_Ch8.3 Q5_Ch9.3 Q5_Ch10.3 Q6_Ch1.3 Q6_Ch2.3 Q6_Ch3.3 Q6_Ch4.3 Q6_Ch5.3 Q6_Ch6.3 Q6_Ch7.3 Q6_Ch8.3 Q6_Ch9.3 Q6_Ch10.3 Q9_HCFetG1.3 Q9_HCFetG2.3 Q9_HCFetG3.3 Q9_HCFetG4.3 Q9_HCFetG5.3 Q9_HCFetG6.3 Q9_HCFetG7.3 Q9_HCFetG8.3 Q9_HCFetG9.3 Q9_HCFetG10.3 R3_Ch1.1 R3_Ch2.1 R3_Ch3.1 R3_Ch4.1 R3_Ch5.1 R3_Ch6.1 R3_Ch7.1 R3_Ch8.1 R3_Ch9.1 R3_Ch10.1 R4_Ch1.1 R4_Ch2.1 R4_Ch3.1 R4_Ch4.1 R4_Ch5.1 R4_Ch6.1 R4_Ch7.1 R4_Ch8.1 R4_Ch9.1 R4_Ch10.1 R7_Ch1.1 R7_Ch2.1 R7_Ch3.1 R7_Ch4.1 R7_Ch5.1 R7_Ch6.1 R7_Ch7.1 R7_Ch8.1 R7_Ch9.1 R7_Ch10.1 R8_Ch1.1 R8_Ch2.1 R8_Ch3.1 R8_Ch4.1 R8_Ch5.1 R8_Ch6.1 R8_Ch7.1 R8_Ch8.1 R8_Ch9.1 R8_Ch10.1 R11_Ch1.1 R11_Ch2.1 R11_Ch3.1 R11_Ch4.1 R11_Ch5.1 R11_Ch6.1 R11_Ch7.1 R11_Ch8.1 R11_Ch9.1 R11_Ch10.1 R12_Ch1.1 R12_Ch2.1 R12_Ch3.1 R12_Ch4.1 R12_Ch5.1 R12_Ch6.1 R12_Ch7.1 R12_Ch8.1 R12_Ch9.1 R12_Ch10.1 R15_Ch1.1 R15_Ch2.1 R15_Ch3.1 R15_Ch4.1 R15_Ch5.1 R15_Ch6.1 R15_Ch7.1 R15_Ch8.1 R15_Ch9.1 R15_Ch10.1 R16_Ch1.1 R16_Ch2.1 R16_Ch3.1 R16_Ch4.1 R16_Ch5.1 R16_Ch6.1 R16_Ch7.1 R16_Ch8.1 R16_Ch9.1 R16_Ch10.1 R17.2 R19.2 R22_HCFetG1.1 R22_HCFetG2.1 R22_HCFetG3.1 R22_HCFetG4.1 R22_HCFetG5.1 R22_HCFetG6.1 R22_HCFetG7.1 R22_HCFetG8.1 R22_HCFetG9.1 R22_HCFetG10.1 R24_HCFetV1.1 R24_HCFetV2.1 R24_HCFetV3.1 R24_HCFetV4.1 R24_HCFetV5.1 R24_HCFetV6.1 R24_HCFetV7.1 R24_HCFetV8.1 R24_HCFetV9.1 R24_HCFetV10.1 R26_MotFet1.1 R26_MotFet2.1 R26_MotFet3.1 R26_MotFet4.1 R26_MotFet5.1 R26_MotFet6.1 R26_MotFet7.1 R28_SensorLED1.2 R28_SensorLED2.2 R28_SensorLED3.2 R28_SensorLED4.2 R28_SensorLED5.2 R28_SensorLED6.2 R28_SensorLED7.2 R28_SensorLED8.2 R28_SensorLED9.2 R28_SensorLED10.2 R28_SensorLED11.2 R28_SensorLED12.2 R28_SensorLED13.2 R28_SensorLED14.2 SR1_Ch1.8 SR1_Ch1.13 SR1_Ch2.8 SR1_Ch2.13 SR1_Ch3.8 SR1_Ch3.13 SR1_Ch4.8 SR1_Ch4.13 SR1_Ch5.8 SR1_Ch5.13 SR1_Ch6.8 SR1_Ch6.13 SR1_Ch7.8 SR1_Ch7.13 SR1_Ch8.8 SR1_Ch8.13 SR1_Ch9.8 SR1_Ch9.13 SR1_Ch10.8 SR1_Ch10.13 SR_MotCtrl.8 SR_MotCtrl.13 SR_ShelfSR1.8 SR_ShelfSR1.13 SR_ShelfSR2.8 SR_ShelfSR2.13 SR_ShelfSR3.8 SR_ShelfSR3.13 SR_ShelfSR4.8 SR_ShelfSR4.13 SR_ShelfSR5.8 SR_ShelfSR5.13
GNDMeasure: ACSout1.1 Q3_Ch1.3 Q3_Ch2.3 Q3_Ch3.3 Q3_Ch4.3 Q3_Ch5.3 Q3_Ch6.3 Q3_Ch7.3 Q3_Ch8.3 Q3_Ch9.3 Q3_Ch10.3 Q4_Ch1.3 Q4_Ch2.3 Q4_Ch3.3 Q4_Ch4.3 Q4_Ch5.3 Q4_Ch6.3 Q4_Ch7.3 Q4_Ch8.3 Q4_Ch9.3 Q4_Ch10.3 Q7_Ch1.3 Q7_Ch2.3 Q7_Ch3.3 Q7_Ch4.3 Q7_Ch5.3 Q7_Ch6.3 Q7_Ch7.3 Q7_Ch8.3 Q7_Ch9.3 Q7_Ch10.3 Q8_Ch1.3 Q8_Ch2.3 Q8_Ch3.3 Q8_Ch4.3 Q8_Ch5.3 Q8_Ch6.3 Q8_Ch7.3 Q8_Ch8.3 Q8_Ch9.3 Q8_Ch10.3
GNDY1: P1.2 P1.6 P1.9 P1.16 P1.18 P1.20 P1.22 P1.24 P6.2 P6.6 P6.9 P6.16 P6.18 P6.20 P6.22 P6.24 PHC_Ch1.11 PHC_Ch6.11
GNDY2: P2.2 P2.6 P2.9 P2.16 P2.18 P2.20 P2.22 P2.24 P7.2 P7.6 P7.9 P7.16 P7.18 P7.20 P7.22 P7.24 PHC_Ch2.11 PHC_Ch7.11
GNDY3: P3.2 P3.6 P3.9 P3.16 P3.18 P3.20 P3.22 P3.24 P8.2 P8.6 P8.9 P8.16 P8.18 P8.20 P8.22 P8.24 PHC_Ch3.11 PHC_Ch8.11
GNDY4: P4.2 P4.6 P4.9 P4.16 P4.18 P4.20 P4.22 P4.24 P9.2 P9.6 P9.9 P9.16 P9.18 P9.20 P9.22 P9.24 PHC_Ch4.11 PHC_Ch9.11
GNDY5: P5.2 P5.6 P5.9 P5.16 P5.18 P5.20 P5.22 P5.24 P10.2 P10.6 P10.9 P10.16 P10.18 P10.20 P10.22 P10.24 PHC_Ch5.11 PHC_Ch10.11
GNDYL1: P1.26 P1.28 P1.30 P1.32 P6.26 P6.28 P6.30 P6.32
GNDYL2: P2.26 P2.28 P2.30 P2.32 P7.26 P7.28 P7.30 P7.32
GNDYL3: P3.26 P3.28 P3.30 P3.32 P8.26 P8.28 P8.30 P8.32
GNDYL4: P4.26 P4.28 P4.30 P4.32 P9.26 P9.28 P9.30 P9.32
GNDYL5: P5.26 P5.28 P5.30 P5.32 P10.26 P10.28 P10.30 P10.32
GRAnd_Ch1: R2_Ch1.1 SR1_Ch1.15
GRAnd_Ch2: R2_Ch2.1 SR1_Ch2.15
GRAnd_Ch3: R2_Ch3.1 SR1_Ch3.15
GRAnd_Ch4: R2_Ch4.1 SR1_Ch4.15
GRAnd_Ch5: R2_Ch5.1 SR1_Ch5.15
GRAnd_Ch6: R2_Ch6.1 SR1_Ch6.15
GRAnd_Ch7: R2_Ch7.1 SR1_Ch7.15
GRAnd_Ch8: R2_Ch8.1 SR1_Ch8.15
GRAnd_Ch9: R2_Ch9.1 SR1_Ch9.15
GRAnd_Ch10: R2_Ch10.1 SR1_Ch10.15
GRIP_Ch1: R1_Ch1.1 SR1_Ch1.2
GRIP_Ch2: R1_Ch2.1 SR1_Ch2.2
GRIP_Ch3: R1_Ch3.1 SR1_Ch3.2
GRIP_Ch4: R1_Ch4.1 SR1_Ch4.2
GRIP_Ch5: R1_Ch5.1 SR1_Ch5.2
GRIP_Ch6: R1_Ch6.1 SR1_Ch6.2
GRIP_Ch7: R1_Ch7.1 SR1_Ch7.2
GRIP_Ch8: R1_Ch8.1 SR1_Ch8.2
GRIP_Ch9: R1_Ch9.1 SR1_Ch9.2
GRIP_Ch10: R1_Ch10.1 SR1_Ch10.2
GRTC_Ch1: R9_Ch1.1 SR1_Ch1.4
GRTC_Ch2: R9_Ch2.1 SR1_Ch2.4
GRTC_Ch3: R9_Ch3.1 SR1_Ch3.4
GRTC_Ch4: R9_Ch4.1 SR1_Ch4.4
GRTC_Ch5: R9_Ch5.1 SR1_Ch5.4
GRTC_Ch6: R9_Ch6.1 SR1_Ch6.4
GRTC_Ch7: R9_Ch7.1 SR1_Ch7.4
GRTC_Ch8: R9_Ch8.1 SR1_Ch8.4
GRTC_Ch9: R9_Ch9.1 SR1_Ch9.4
GRTC_Ch10: R9_Ch10.1 SR1_Ch10.4
GRUSB_Ch1: R10_Ch1.1 SR1_Ch1.6
GRUSB_Ch2: R10_Ch2.1 SR1_Ch2.6
GRUSB_Ch3: R10_Ch3.1 SR1_Ch3.6
GRUSB_Ch4: R10_Ch4.1 SR1_Ch4.6
GRUSB_Ch5: R10_Ch5.1 SR1_Ch5.6
GRUSB_Ch6: R10_Ch6.1 SR1_Ch6.6
GRUSB_Ch7: R10_Ch7.1 SR1_Ch7.6
GRUSB_Ch8: R10_Ch8.1 SR1_Ch8.6
GRUSB_Ch9: R10_Ch9.1 SR1_Ch9.6
GRUSB_Ch10: R10_Ch10.1 SR1_Ch10.6
IPGND_Ch1: PHC_Ch1.3
IPGND_Ch2: PHC_Ch2.3
IPGND_Ch3: PHC_Ch3.3
IPGND_Ch4: PHC_Ch4.3
IPGND_Ch5: PHC_Ch5.3
IPGND_Ch6: PHC_Ch6.3
IPGND_Ch7: PHC_Ch7.3
IPGND_Ch8: PHC_Ch8.3
IPGND_Ch9: PHC_Ch9.3
IPGND_Ch10: PHC_Ch10.3
IPVCC_Ch1: JIP_Ch1.2 PHC_Ch1.4
IPVCC_Ch2: JIP_Ch2.2 PHC_Ch2.4
IPVCC_Ch3: JIP_Ch3.2 PHC_Ch3.4
IPVCC_Ch4: JIP_Ch4.2 PHC_Ch4.4
IPVCC_Ch5: JIP_Ch5.2 PHC_Ch5.4
IPVCC_Ch6: JIP_Ch6.2 PHC_Ch6.4
IPVCC_Ch7: JIP_Ch7.2 PHC_Ch7.4
IPVCC_Ch8: JIP_Ch8.2 PHC_Ch8.4
IPVCC_Ch9: JIP_Ch9.2 PHC_Ch9.4
IPVCC_Ch10: JIP_Ch10.2 PHC_Ch10.4
LAnd1-2V: P1.23 P2.23 P3.23 P4.23 P5.23 Q12_SensorLED14.3
LAnd2-2V: P6.23 P7.23 P8.23 P9.23 P10.23 Q12_SensorLED7.3
LDC1-2V: P1.15 P2.15 P3.15 P4.15 P5.15 Q12_SensorLED8.3
LDC2-2V: P6.15 P7.15 P8.15 P9.15 P10.15 Q12_SensorLED1.3
LG1-2V: P1.27 P2.27 P3.27 P4.27 P5.27
LG2-2V: P6.27 P7.27 P8.27 P9.27 P10.27
LIP1-2V: P1.21 P2.21 P3.21 P4.21 P5.21 Q12_SensorLED11.3
LIP2-2V: P6.21 P7.21 P8.21 P9.21 P10.21 Q12_SensorLED4.3
Lock1-12V: PHC_Ch1.12 PHC_Ch2.12 PHC_Ch3.12 PHC_Ch4.12 PHC_Ch5.12
Lock2-12V: PHC_Ch6.12 PHC_Ch7.12 PHC_Ch8.12 PHC_Ch9.12 PHC_Ch10.12
LR1-2V: P1.31 P2.31 P3.31 P4.31 P5.31
LR2-2V: P6.31 P7.31 P8.31 P9.31 P10.31
LSen1-2V: P1.4 P2.4 P3.4 P4.4 P5.4 Q12_SensorLED12.3
LSen2-2V: P6.4 P7.4 P8.4 P9.4 P10.4 Q12_SensorLED5.3
LTC1-2V: P1.19 P2.19 P3.19 P4.19 P5.19 Q12_SensorLED10.3
LTC2-2V: P6.19 P7.19 P8.19 P9.19 P10.19 Q12_SensorLED3.3
LUSB1-2V: P1.17 P2.17 P3.17 P4.17 P5.17 Q12_SensorLED9.3
LUSB2-2V: P6.17 P7.17 P8.17 P9.17 P10.17 Q12_SensorLED2.3
LY1-2V: P1.29 P2.29 P3.29 P4.29 P5.29
LY2-2V: P6.29 P7.29 P8.29 P9.29 P10.29
MoX1: PHC_Ch1.9 PHC_Ch2.9 PHC_Ch3.9 PHC_Ch4.9 PHC_Ch5.9 Q11_MotFet7.2
MoX1Sig: R25_MotFet7.1 SR_MotCtrl.15
MoX2: PHC_Ch6.9 PHC_Ch7.9 PHC_Ch8.9 PHC_Ch9.9 PHC_Ch10.9 Q11_MotFet6.2
MoX2Sig: R25_MotFet6.1 SR_MotCtrl.6
MoY1: PHC_Ch1.10 PHC_Ch6.10 Q11_MotFet1.2
MoY1Sig: R25_MotFet1.1 SR_MotCtrl.1
MoY2: PHC_Ch2.10 PHC_Ch7.10 Q11_MotFet2.2
MoY2Sig: R25_MotFet2.1 SR_MotCtrl.4
MoY3: PHC_Ch3.10 PHC_Ch8.10 Q11_MotFet3.2
MoY3Sig: R25_MotFet3.1 SR_MotCtrl.3
MoY4: PHC_Ch4.10 PHC_Ch9.10 Q11_MotFet4.2
MoY4Sig: R25_MotFet4.1 SR_MotCtrl.5
MoY5: PHC_Ch5.10 PHC_Ch10.10 Q11_MotFet5.2
MoY5Sig: R25_MotFet5.1 SR_MotCtrl.2
MSWSen: ArdPin1.7 D14_SenIn1.A D14_SenIn2.A D14_SenIn3.A D14_SenIn4.A D14_SenIn5.A D14_SenIn6.A D14_SenIn7.A D14_SenIn8.A D14_SenIn9.A D14_SenIn10.A
MSWSen1: P1.7
MSWSen2: P2.7
MSWSen3: P3.7
MSWSen4: P4.7
MSWSen5: P5.7
MSWSen6: P6.7
MSWSen7: P7.7
MSWSen8: P8.7
MSWSen9: P9.7
MSWSen10: P10.7
NetC3_1: C3.1 LM1.4 R17.1 R18.2
NetC6_1: C6.1 LM2.4 R19.1 R20.2
NetChAnd_Ch1_5: ChAnd_Ch1.5 optSupAnd_Ch1.2
NetChAnd_Ch2_5: ChAnd_Ch2.5 optSupAnd_Ch2.2
NetChAnd_Ch3_5: ChAnd_Ch3.5 optSupAnd_Ch3.2
NetChAnd_Ch4_5: ChAnd_Ch4.5 optSupAnd_Ch4.2
NetChAnd_Ch5_5: ChAnd_Ch5.5 optSupAnd_Ch5.2
NetChAnd_Ch6_5: ChAnd_Ch6.5 optSupAnd_Ch6.2
NetChAnd_Ch7_5: ChAnd_Ch7.5 optSupAnd_Ch7.2
NetChAnd_Ch8_5: ChAnd_Ch8.5 optSupAnd_Ch8.2
NetChAnd_Ch9_5: ChAnd_Ch9.5 optSupAnd_Ch9.2
NetChAnd_Ch10_5: ChAnd_Ch10.5 optSupAnd_Ch10.2
NetChIP_Ch1_5: ChIP_Ch1.5 optSupIP_Ch1.2
NetChIP_Ch2_5: ChIP_Ch2.5 optSupIP_Ch2.2
NetChIP_Ch3_5: ChIP_Ch3.5 optSupIP_Ch3.2
NetChIP_Ch4_5: ChIP_Ch4.5 optSupIP_Ch4.2
NetChIP_Ch5_5: ChIP_Ch5.5 optSupIP_Ch5.2
NetChIP_Ch6_5: ChIP_Ch6.5 optSupIP_Ch6.2
NetChIP_Ch7_5: ChIP_Ch7.5 optSupIP_Ch7.2
NetChIP_Ch8_5: ChIP_Ch8.5 optSupIP_Ch8.2
NetChIP_Ch9_5: ChIP_Ch9.5 optSupIP_Ch9.2
NetChIP_Ch10_5: ChIP_Ch10.5 optSupIP_Ch10.2
NetChTC_Ch1_5: ChTC_Ch1.5 optSupTC_Ch1.2
NetChTC_Ch2_5: ChTC_Ch2.5 optSupTC_Ch2.2
NetChTC_Ch3_5: ChTC_Ch3.5 optSupTC_Ch3.2
NetChTC_Ch4_5: ChTC_Ch4.5 optSupTC_Ch4.2
NetChTC_Ch5_5: ChTC_Ch5.5 optSupTC_Ch5.2
NetChTC_Ch6_5: ChTC_Ch6.5 optSupTC_Ch6.2
NetChTC_Ch7_5: ChTC_Ch7.5 optSupTC_Ch7.2
NetChTC_Ch8_5: ChTC_Ch8.5 optSupTC_Ch8.2
NetChTC_Ch9_5: ChTC_Ch9.5 optSupTC_Ch9.2
NetChTC_Ch10_5: ChTC_Ch10.5 optSupTC_Ch10.2
NetChUSB_Ch1_5: ChUSB_Ch1.5 optSupUSB_Ch1.2
NetChUSB_Ch2_5: ChUSB_Ch2.5 optSupUSB_Ch2.2
NetChUSB_Ch3_5: ChUSB_Ch3.5 optSupUSB_Ch3.2
NetChUSB_Ch4_5: ChUSB_Ch4.5 optSupUSB_Ch4.2
NetChUSB_Ch5_5: ChUSB_Ch5.5 optSupUSB_Ch5.2
NetChUSB_Ch6_5: ChUSB_Ch6.5 optSupUSB_Ch6.2
NetChUSB_Ch7_5: ChUSB_Ch7.5 optSupUSB_Ch7.2
NetChUSB_Ch8_5: ChUSB_Ch8.5 optSupUSB_Ch8.2
NetChUSB_Ch9_5: ChUSB_Ch9.5 optSupUSB_Ch9.2
NetChUSB_Ch10_5: ChUSB_Ch10.5 optSupUSB_Ch10.2
NetD1_Ch1_2: D1_Ch1.A Q1_Ch1.2
NetD1_Ch2_2: D1_Ch2.A Q1_Ch2.2
NetD1_Ch3_2: D1_Ch3.A Q1_Ch3.2
NetD1_Ch4_2: D1_Ch4.A Q1_Ch4.2
NetD1_Ch5_2: D1_Ch5.A Q1_Ch5.2
NetD1_Ch6_2: D1_Ch6.A Q1_Ch6.2
NetD1_Ch7_2: D1_Ch7.A Q1_Ch7.2
NetD1_Ch8_2: D1_Ch8.A Q1_Ch8.2
NetD1_Ch9_2: D1_Ch9.A Q1_Ch9.2
NetD1_Ch10_2: D1_Ch10.A Q1_Ch10.2
NetD2_Ch1_2: D2_Ch1.A Q2_Ch1.2
NetD2_Ch2_2: D2_Ch2.A Q2_Ch2.2
NetD2_Ch3_2: D2_Ch3.A Q2_Ch3.2
NetD2_Ch4_2: D2_Ch4.A Q2_Ch4.2
NetD2_Ch5_2: D2_Ch5.A Q2_Ch5.2
NetD2_Ch6_2: D2_Ch6.A Q2_Ch6.2
NetD2_Ch7_2: D2_Ch7.A Q2_Ch7.2
NetD2_Ch8_2: D2_Ch8.A Q2_Ch8.2
NetD2_Ch9_2: D2_Ch9.A Q2_Ch9.2
NetD2_Ch10_2: D2_Ch10.A Q2_Ch10.2
NetD3_Ch1_2: D3_Ch1.A Q3_Ch1.2
NetD3_Ch2_2: D3_Ch2.A Q3_Ch2.2
NetD3_Ch3_2: D3_Ch3.A Q3_Ch3.2
NetD3_Ch4_2: D3_Ch4.A Q3_Ch4.2
NetD3_Ch5_2: D3_Ch5.A Q3_Ch5.2
NetD3_Ch6_2: D3_Ch6.A Q3_Ch6.2
NetD3_Ch7_2: D3_Ch7.A Q3_Ch7.2
NetD3_Ch8_2: D3_Ch8.A Q3_Ch8.2
NetD3_Ch9_2: D3_Ch9.A Q3_Ch9.2
NetD3_Ch10_2: D3_Ch10.A Q3_Ch10.2
NetD4_Ch1_2: D4_Ch1.A Q4_Ch1.2
NetD4_Ch2_2: D4_Ch2.A Q4_Ch2.2
NetD4_Ch3_2: D4_Ch3.A Q4_Ch3.2
NetD4_Ch4_2: D4_Ch4.A Q4_Ch4.2
NetD4_Ch5_2: D4_Ch5.A Q4_Ch5.2
NetD4_Ch6_2: D4_Ch6.A Q4_Ch6.2
NetD4_Ch7_2: D4_Ch7.A Q4_Ch7.2
NetD4_Ch8_2: D4_Ch8.A Q4_Ch8.2
NetD4_Ch9_2: D4_Ch9.A Q4_Ch9.2
NetD4_Ch10_2: D4_Ch10.A Q4_Ch10.2
NetD5_Ch1_2: D5_Ch1.A Q5_Ch1.2
NetD5_Ch2_2: D5_Ch2.A Q5_Ch2.2
NetD5_Ch3_2: D5_Ch3.A Q5_Ch3.2
NetD5_Ch4_2: D5_Ch4.A Q5_Ch4.2
NetD5_Ch5_2: D5_Ch5.A Q5_Ch5.2
NetD5_Ch6_2: D5_Ch6.A Q5_Ch6.2
NetD5_Ch7_2: D5_Ch7.A Q5_Ch7.2
NetD5_Ch8_2: D5_Ch8.A Q5_Ch8.2
NetD5_Ch9_2: D5_Ch9.A Q5_Ch9.2
NetD5_Ch10_2: D5_Ch10.A Q5_Ch10.2
NetD6_Ch1_2: Q6_Ch1.2
NetD6_Ch2_2: Q6_Ch2.2
NetD6_Ch3_2: Q6_Ch3.2
NetD6_Ch4_2: Q6_Ch4.2
NetD6_Ch5_2: Q6_Ch5.2
NetD6_Ch6_2: Q6_Ch6.2
NetD6_Ch7_2: Q6_Ch7.2
NetD6_Ch8_2: Q6_Ch8.2
NetD6_Ch9_2: Q6_Ch9.2
NetD6_Ch10_2: Q6_Ch10.2
NetD7_Ch1_2: D7_Ch1.A Q7_Ch1.2
NetD7_Ch2_2: D7_Ch2.A Q7_Ch2.2
NetD7_Ch3_2: D7_Ch3.A Q7_Ch3.2
NetD7_Ch4_2: D7_Ch4.A Q7_Ch4.2
NetD7_Ch5_2: D7_Ch5.A Q7_Ch5.2
NetD7_Ch6_2: D7_Ch6.A Q7_Ch6.2
NetD7_Ch7_2: D7_Ch7.A Q7_Ch7.2
NetD7_Ch8_2: D7_Ch8.A Q7_Ch8.2
NetD7_Ch9_2: D7_Ch9.A Q7_Ch9.2
NetD7_Ch10_2: D7_Ch10.A Q7_Ch10.2
NetD8_Ch1_2: Q8_Ch1.2
NetD8_Ch2_2: Q8_Ch2.2
NetD8_Ch3_2: Q8_Ch3.2
NetD8_Ch4_2: Q8_Ch4.2
NetD8_Ch5_2: Q8_Ch5.2
NetD8_Ch6_2: Q8_Ch6.2
NetD8_Ch7_2: Q8_Ch7.2
NetD8_Ch8_2: Q8_Ch8.2
NetD8_Ch9_2: Q8_Ch9.2
NetD8_Ch10_2: Q8_Ch10.2
NetD9_C: D9.C L1.1 LM1.2
NetD10_C: D10.C L2.1 LM2.2
NetD11_HCFetG1_2: D11_HCFetG1.A Q9_HCFetG1.2
NetD11_HCFetG2_2: D11_HCFetG2.A Q9_HCFetG2.2
NetD11_HCFetG3_2: D11_HCFetG3.A Q9_HCFetG3.2
NetD11_HCFetG4_2: D11_HCFetG4.A Q9_HCFetG4.2
NetD11_HCFetG5_2: D11_HCFetG5.A Q9_HCFetG5.2
NetD11_HCFetG6_2: D11_HCFetG6.A Q9_HCFetG6.2
NetD11_HCFetG7_2: D11_HCFetG7.A Q9_HCFetG7.2
NetD11_HCFetG8_2: D11_HCFetG8.A Q9_HCFetG8.2
NetD11_HCFetG9_2: D11_HCFetG9.A Q9_HCFetG9.2
NetD11_HCFetG10_2: D11_HCFetG10.A Q9_HCFetG10.2
NetD12_HCFetV1_1: D12_HCFetV1.A Q10_HCFetV1.2
NetD12_HCFetV2_1: D12_HCFetV2.A Q10_HCFetV2.2
NetD12_HCFetV3_1: D12_HCFetV3.A Q10_HCFetV3.2
NetD12_HCFetV4_1: D12_HCFetV4.A Q10_HCFetV4.2
NetD12_HCFetV5_1: D12_HCFetV5.A Q10_HCFetV5.2
NetD12_HCFetV6_1: D12_HCFetV6.A Q10_HCFetV6.2
NetD12_HCFetV7_1: D12_HCFetV7.A Q10_HCFetV7.2
NetD12_HCFetV8_1: D12_HCFetV8.A Q10_HCFetV8.2
NetD12_HCFetV9_1: D12_HCFetV9.A Q10_HCFetV9.2
NetD12_HCFetV10_1: D12_HCFetV10.A Q10_HCFetV10.2
NetD13_MotFet1_A: D13_MotFet1.A R25_MotFet1.2
NetD13_MotFet1_C: D13_MotFet1.C Q11_MotFet1.1 R26_MotFet1.2
NetD13_MotFet2_A: D13_MotFet2.A R25_MotFet2.2
NetD13_MotFet2_C: D13_MotFet2.C Q11_MotFet2.1 R26_MotFet2.2
NetD13_MotFet3_A: D13_MotFet3.A R25_MotFet3.2
NetD13_MotFet3_C: D13_MotFet3.C Q11_MotFet3.1 R26_MotFet3.2
NetD13_MotFet4_A: D13_MotFet4.A R25_MotFet4.2
NetD13_MotFet4_C: D13_MotFet4.C Q11_MotFet4.1 R26_MotFet4.2
NetD13_MotFet5_A: D13_MotFet5.A R25_MotFet5.2
NetD13_MotFet5_C: D13_MotFet5.C Q11_MotFet5.1 R26_MotFet5.2
NetD13_MotFet6_A: D13_MotFet6.A R25_MotFet6.2
NetD13_MotFet6_C: D13_MotFet6.C Q11_MotFet6.1 R26_MotFet6.2
NetD13_MotFet7_A: D13_MotFet7.A R25_MotFet7.2
NetD13_MotFet7_C: D13_MotFet7.C Q11_MotFet7.1 R26_MotFet7.2
NetQ1_Ch1_1: Q1_Ch1.1 R1_Ch1.2 R3_Ch1.2
NetQ1_Ch2_1: Q1_Ch2.1 R1_Ch2.2 R3_Ch2.2
NetQ1_Ch3_1: Q1_Ch3.1 R1_Ch3.2 R3_Ch3.2
NetQ1_Ch4_1: Q1_Ch4.1 R1_Ch4.2 R3_Ch4.2
NetQ1_Ch5_1: Q1_Ch5.1 R1_Ch5.2 R3_Ch5.2
NetQ1_Ch6_1: Q1_Ch6.1 R1_Ch6.2 R3_Ch6.2
NetQ1_Ch7_1: Q1_Ch7.1 R1_Ch7.2 R3_Ch7.2
NetQ1_Ch8_1: Q1_Ch8.1 R1_Ch8.2 R3_Ch8.2
NetQ1_Ch9_1: Q1_Ch9.1 R1_Ch9.2 R3_Ch9.2
NetQ1_Ch10_1: Q1_Ch10.1 R1_Ch10.2 R3_Ch10.2
NetQ2_Ch1_1: Q2_Ch1.1 R2_Ch1.2 R4_Ch1.2
NetQ2_Ch2_1: Q2_Ch2.1 R2_Ch2.2 R4_Ch2.2
NetQ2_Ch3_1: Q2_Ch3.1 R2_Ch3.2 R4_Ch3.2
NetQ2_Ch4_1: Q2_Ch4.1 R2_Ch4.2 R4_Ch4.2
NetQ2_Ch5_1: Q2_Ch5.1 R2_Ch5.2 R4_Ch5.2
NetQ2_Ch6_1: Q2_Ch6.1 R2_Ch6.2 R4_Ch6.2
NetQ2_Ch7_1: Q2_Ch7.1 R2_Ch7.2 R4_Ch7.2
NetQ2_Ch8_1: Q2_Ch8.1 R2_Ch8.2 R4_Ch8.2
NetQ2_Ch9_1: Q2_Ch9.1 R2_Ch9.2 R4_Ch9.2
NetQ2_Ch10_1: Q2_Ch10.1 R2_Ch10.2 R4_Ch10.2
NetQ3_Ch1_1: Q3_Ch1.1 R5_Ch1.2 R7_Ch1.2
NetQ3_Ch2_1: Q3_Ch2.1 R5_Ch2.2 R7_Ch2.2
NetQ3_Ch3_1: Q3_Ch3.1 R5_Ch3.2 R7_Ch3.2
NetQ3_Ch4_1: Q3_Ch4.1 R5_Ch4.2 R7_Ch4.2
NetQ3_Ch5_1: Q3_Ch5.1 R5_Ch5.2 R7_Ch5.2
NetQ3_Ch6_1: Q3_Ch6.1 R5_Ch6.2 R7_Ch6.2
NetQ3_Ch7_1: Q3_Ch7.1 R5_Ch7.2 R7_Ch7.2
NetQ3_Ch8_1: Q3_Ch8.1 R5_Ch8.2 R7_Ch8.2
NetQ3_Ch9_1: Q3_Ch9.1 R5_Ch9.2 R7_Ch9.2
NetQ3_Ch10_1: Q3_Ch10.1 R5_Ch10.2 R7_Ch10.2
NetQ4_Ch1_1: Q4_Ch1.1 R6_Ch1.2 R8_Ch1.2
NetQ4_Ch2_1: Q4_Ch2.1 R6_Ch2.2 R8_Ch2.2
NetQ4_Ch3_1: Q4_Ch3.1 R6_Ch3.2 R8_Ch3.2
NetQ4_Ch4_1: Q4_Ch4.1 R6_Ch4.2 R8_Ch4.2
NetQ4_Ch5_1: Q4_Ch5.1 R6_Ch5.2 R8_Ch5.2
NetQ4_Ch6_1: Q4_Ch6.1 R6_Ch6.2 R8_Ch6.2
NetQ4_Ch7_1: Q4_Ch7.1 R6_Ch7.2 R8_Ch7.2
NetQ4_Ch8_1: Q4_Ch8.1 R6_Ch8.2 R8_Ch8.2
NetQ4_Ch9_1: Q4_Ch9.1 R6_Ch9.2 R8_Ch9.2
NetQ4_Ch10_1: Q4_Ch10.1 R6_Ch10.2 R8_Ch10.2
NetQ5_Ch1_1: Q5_Ch1.1 R9_Ch1.2 R11_Ch1.2
NetQ5_Ch2_1: Q5_Ch2.1 R9_Ch2.2 R11_Ch2.2
NetQ5_Ch3_1: Q5_Ch3.1 R9_Ch3.2 R11_Ch3.2
NetQ5_Ch4_1: Q5_Ch4.1 R9_Ch4.2 R11_Ch4.2
NetQ5_Ch5_1: Q5_Ch5.1 R9_Ch5.2 R11_Ch5.2
NetQ5_Ch6_1: Q5_Ch6.1 R9_Ch6.2 R11_Ch6.2
NetQ5_Ch7_1: Q5_Ch7.1 R9_Ch7.2 R11_Ch7.2
NetQ5_Ch8_1: Q5_Ch8.1 R9_Ch8.2 R11_Ch8.2
NetQ5_Ch9_1: Q5_Ch9.1 R9_Ch9.2 R11_Ch9.2
NetQ5_Ch10_1: Q5_Ch10.1 R9_Ch10.2 R11_Ch10.2
NetQ6_Ch1_1: Q6_Ch1.1 R10_Ch1.2 R12_Ch1.2
NetQ6_Ch2_1: Q6_Ch2.1 R10_Ch2.2 R12_Ch2.2
NetQ6_Ch3_1: Q6_Ch3.1 R10_Ch3.2 R12_Ch3.2
NetQ6_Ch4_1: Q6_Ch4.1 R10_Ch4.2 R12_Ch4.2
NetQ6_Ch5_1: Q6_Ch5.1 R10_Ch5.2 R12_Ch5.2
NetQ6_Ch6_1: Q6_Ch6.1 R10_Ch6.2 R12_Ch6.2
NetQ6_Ch7_1: Q6_Ch7.1 R10_Ch7.2 R12_Ch7.2
NetQ6_Ch8_1: Q6_Ch8.1 R10_Ch8.2 R12_Ch8.2
NetQ6_Ch9_1: Q6_Ch9.1 R10_Ch9.2 R12_Ch9.2
NetQ6_Ch10_1: Q6_Ch10.1 R10_Ch10.2 R12_Ch10.2
NetQ7_Ch1_1: Q7_Ch1.1 R13_Ch1.2 R15_Ch1.2
NetQ7_Ch2_1: Q7_Ch2.1 R13_Ch2.2 R15_Ch2.2
NetQ7_Ch3_1: Q7_Ch3.1 R13_Ch3.2 R15_Ch3.2
NetQ7_Ch4_1: Q7_Ch4.1 R13_Ch4.2 R15_Ch4.2
NetQ7_Ch5_1: Q7_Ch5.1 R13_Ch5.2 R15_Ch5.2
NetQ7_Ch6_1: Q7_Ch6.1 R13_Ch6.2 R15_Ch6.2
NetQ7_Ch7_1: Q7_Ch7.1 R13_Ch7.2 R15_Ch7.2
NetQ7_Ch8_1: Q7_Ch8.1 R13_Ch8.2 R15_Ch8.2
NetQ7_Ch9_1: Q7_Ch9.1 R13_Ch9.2 R15_Ch9.2
NetQ7_Ch10_1: Q7_Ch10.1 R13_Ch10.2 R15_Ch10.2
NetQ8_Ch1_1: Q8_Ch1.1 R14_Ch1.2 R16_Ch1.2
NetQ8_Ch2_1: Q8_Ch2.1 R14_Ch2.2 R16_Ch2.2
NetQ8_Ch3_1: Q8_Ch3.1 R14_Ch3.2 R16_Ch3.2
NetQ8_Ch4_1: Q8_Ch4.1 R14_Ch4.2 R16_Ch4.2
NetQ8_Ch5_1: Q8_Ch5.1 R14_Ch5.2 R16_Ch5.2
NetQ8_Ch6_1: Q8_Ch6.1 R14_Ch6.2 R16_Ch6.2
NetQ8_Ch7_1: Q8_Ch7.1 R14_Ch7.2 R16_Ch7.2
NetQ8_Ch8_1: Q8_Ch8.1 R14_Ch8.2 R16_Ch8.2
NetQ8_Ch9_1: Q8_Ch9.1 R14_Ch9.2 R16_Ch9.2
NetQ8_Ch10_1: Q8_Ch10.1 R14_Ch10.2 R16_Ch10.2
NetQ9_HCFetG1_1: Q9_HCFetG1.1 R21_HCFetG1.2 R22_HCFetG1.2
NetQ9_HCFetG2_1: Q9_HCFetG2.1 R21_HCFetG2.2 R22_HCFetG2.2
NetQ9_HCFetG3_1: Q9_HCFetG3.1 R21_HCFetG3.2 R22_HCFetG3.2
NetQ9_HCFetG4_1: Q9_HCFetG4.1 R21_HCFetG4.2 R22_HCFetG4.2
NetQ9_HCFetG5_1: Q9_HCFetG5.1 R21_HCFetG5.2 R22_HCFetG5.2
NetQ9_HCFetG6_1: Q9_HCFetG6.1 R21_HCFetG6.2 R22_HCFetG6.2
NetQ9_HCFetG7_1: Q9_HCFetG7.1 R21_HCFetG7.2 R22_HCFetG7.2
NetQ9_HCFetG8_1: Q9_HCFetG8.1 R21_HCFetG8.2 R22_HCFetG8.2
NetQ9_HCFetG9_1: Q9_HCFetG9.1 R21_HCFetG9.2 R22_HCFetG9.2
NetQ9_HCFetG10_1: Q9_HCFetG10.1 R21_HCFetG10.2 R22_HCFetG10.2
NetQ10_HCFetV1_1: Q10_HCFetV1.1 R23_HCFetV1.2 R24_HCFetV1.2
NetQ10_HCFetV2_1: Q10_HCFetV2.1 R23_HCFetV2.2 R24_HCFetV2.2
NetQ10_HCFetV3_1: Q10_HCFetV3.1 R23_HCFetV3.2 R24_HCFetV3.2
NetQ10_HCFetV4_1: Q10_HCFetV4.1 R23_HCFetV4.2 R24_HCFetV4.2
NetQ10_HCFetV5_1: Q10_HCFetV5.1 R23_HCFetV5.2 R24_HCFetV5.2
NetQ10_HCFetV6_1: Q10_HCFetV6.1 R23_HCFetV6.2 R24_HCFetV6.2
NetQ10_HCFetV7_1: Q10_HCFetV7.1 R23_HCFetV7.2 R24_HCFetV7.2
NetQ10_HCFetV8_1: Q10_HCFetV8.1 R23_HCFetV8.2 R24_HCFetV8.2
NetQ10_HCFetV9_1: Q10_HCFetV9.1 R23_HCFetV9.2 R24_HCFetV9.2
NetQ10_HCFetV10_1: Q10_HCFetV10.1 R23_HCFetV10.2 R24_HCFetV10.2
NetQ12_SensorLED1_1: Q12_SensorLED1.1 R27_SensorLED1.1 R28_SensorLED1.1
NetQ12_SensorLED2_1: Q12_SensorLED2.1 R27_SensorLED2.1 R28_SensorLED2.1
NetQ12_SensorLED3_1: Q12_SensorLED3.1 R27_SensorLED3.1 R28_SensorLED3.1
NetQ12_SensorLED4_1: Q12_SensorLED4.1 R27_SensorLED4.1 R28_SensorLED4.1
NetQ12_SensorLED5_1: Q12_SensorLED5.1 R27_SensorLED5.1 R28_SensorLED5.1
NetQ12_SensorLED6_1: Q12_SensorLED6.1 R27_SensorLED6.1 R28_SensorLED6.1
NetQ12_SensorLED7_1: Q12_SensorLED7.1 R27_SensorLED7.1 R28_SensorLED7.1
NetQ12_SensorLED8_1: Q12_SensorLED8.1 R27_SensorLED8.1 R28_SensorLED8.1
NetQ12_SensorLED9_1: Q12_SensorLED9.1 R27_SensorLED9.1 R28_SensorLED9.1
NetQ12_SensorLED10_1: Q12_SensorLED10.1 R27_SensorLED10.1 R28_SensorLED10.1
NetQ12_SensorLED11_1: Q12_SensorLED11.1 R27_SensorLED11.1 R28_SensorLED11.1
NetQ12_SensorLED12_1: Q12_SensorLED12.1 R27_SensorLED12.1 R28_SensorLED12.1
NetQ12_SensorLED13_1: Q12_SensorLED13.1 R27_SensorLED13.1 R28_SensorLED13.1
NetQ12_SensorLED14_1: Q12_SensorLED14.1 R27_SensorLED14.1 R28_SensorLED14.1
NetR21_HCFetG1_1: R21_HCFetG1.1 SR_ShelfSR3.5
NetR21_HCFetG2_1: R21_HCFetG2.1 SR_ShelfSR3.3
NetR21_HCFetG3_1: R21_HCFetG3.1 SR_ShelfSR3.4
NetR21_HCFetG4_1: R21_HCFetG4.1 SR_ShelfSR3.1
NetR21_HCFetG5_1: R21_HCFetG5.1 SR_ShelfSR3.6
NetR21_HCFetG6_1: R21_HCFetG6.1 SR_ShelfSR3.15
NetR21_HCFetG7_1: R21_HCFetG7.1 SR_ShelfSR4.7
NetR21_HCFetG8_1: R21_HCFetG8.1 SR_ShelfSR4.2
NetR21_HCFetG9_1: R21_HCFetG9.1 SR_ShelfSR4.5
NetR21_HCFetG10_1: R21_HCFetG10.1 SR_ShelfSR4.3
NetR23_HCFetV1_1: R23_HCFetV1.1 SR_ShelfSR1.4
NetR23_HCFetV2_1: R23_HCFetV2.1 SR_ShelfSR1.1
NetR23_HCFetV3_1: R23_HCFetV3.1 SR_ShelfSR1.6
NetR23_HCFetV4_1: R23_HCFetV4.1 SR_ShelfSR1.15
NetR23_HCFetV5_1: R23_HCFetV5.1 SR_ShelfSR2.7
NetR23_HCFetV6_1: R23_HCFetV6.1 SR_ShelfSR4.4
NetR23_HCFetV7_1: R23_HCFetV7.1 SR_ShelfSR4.1
NetR23_HCFetV8_1: R23_HCFetV8.1 SR_ShelfSR4.6
NetR23_HCFetV9_1: R23_HCFetV9.1 SR_ShelfSR4.15
NetR23_HCFetV10_1: R23_HCFetV10.1 SR_ShelfSR5.7
NetR27_SensorLED1_2: R27_SensorLED1.2 SR_ShelfSR2.2
NetR27_SensorLED2_2: R27_SensorLED2.2 SR_ShelfSR2.5
NetR27_SensorLED3_2: R27_SensorLED3.2 SR_ShelfSR2.3
NetR27_SensorLED4_2: R27_SensorLED4.2 SR_ShelfSR2.4
NetR27_SensorLED5_2: R27_SensorLED5.2 SR_ShelfSR2.6
NetR27_SensorLED6_2: R27_SensorLED6.2 SR_ShelfSR2.15
NetR27_SensorLED7_2: R27_SensorLED7.2 SR_ShelfSR2.1
NetR27_SensorLED8_2: R27_SensorLED8.2 SR_ShelfSR5.2
NetR27_SensorLED9_2: R27_SensorLED9.2 SR_ShelfSR5.5
NetR27_SensorLED10_2: R27_SensorLED10.2 SR_ShelfSR5.3
NetR27_SensorLED11_2: R27_SensorLED11.2 SR_ShelfSR5.4
NetR27_SensorLED12_2: R27_SensorLED12.2 SR_ShelfSR5.6
NetR27_SensorLED13_2: R27_SensorLED13.2 SR_ShelfSR5.15
NetR27_SensorLED14_2: R27_SensorLED14.2 SR_ShelfSR5.1
NetSR1_Ch1_9: SR1_Ch1.9 SR1_Ch2.14
NetSR1_Ch2_9: SR1_Ch2.9 SR1_Ch3.14
NetSR1_Ch3_9: SR1_Ch3.9 SR1_Ch4.14
NetSR1_Ch4_9: SR1_Ch4.9 SR1_Ch5.14
NetSR1_Ch5_9: SR1_Ch5.9 SR1_Ch6.14
NetSR1_Ch6_9: SR1_Ch6.9 SR1_Ch7.14
NetSR1_Ch7_9: SR1_Ch7.9 SR1_Ch8.14
NetSR1_Ch8_9: SR1_Ch8.9 SR1_Ch9.14
NetSR1_Ch9_9: SR1_Ch9.9 SR1_Ch10.14
NetSR1_Ch10_9: SR1_Ch10.9 SR_MotCtrl.14
NetSR_MotCtrl_7: SR_MotCtrl.7
NetSR_MotCtrl_9: SR_MotCtrl.9
NetSR_ShelfSR1_2: SR_ShelfSR1.2
NetSR_ShelfSR1_3: SR_ShelfSR1.3
NetSR_ShelfSR1_5: SR_ShelfSR1.5
NetSR_ShelfSR1_7: SR_ShelfSR1.7
NetSR_ShelfSR1_9: SR_ShelfSR1.9
NetSR_ShelfSR3_2: SR_ShelfSR3.2
NetSR_ShelfSR3_7: SR_ShelfSR3.7
PhSen: ArdPin1.8 D17_SenIn1.A D17_SenIn2.A D17_SenIn3.A D17_SenIn4.A D17_SenIn5.A D17_SenIn6.A D17_SenIn7.A D17_SenIn8.A D17_SenIn9.A D17_SenIn10.A
PhSen1: P1.3
PhSen2: P2.3
PhSen3: P3.3
PhSen4: P4.3
PhSen5: P5.3
PhSen6: P6.3
PhSen7: P7.3
PhSen8: P8.3
PhSen9: P9.3
PhSen10: P10.3
SCL: ArdPin1.10 D15_SenIn1.A D15_SenIn2.A D15_SenIn3.A D15_SenIn4.A D15_SenIn5.A D15_SenIn6.A D15_SenIn7.A D15_SenIn8.A D15_SenIn9.A D15_SenIn10.A
SCL1: P1.11
SCL2: P2.11
SCL3: P3.11
SCL4: P4.11
SCL5: P5.11
SCL6: P6.11
SCL7: P7.11
SCL8: P8.11
SCL9: P9.11
SCL10: P10.11
SDA: ArdPin1.9 D16_SenIn1.A D16_SenIn2.A D16_SenIn3.A D16_SenIn4.A D16_SenIn5.A D16_SenIn6.A D16_SenIn7.A D16_SenIn8.A D16_SenIn9.A D16_SenIn10.A
SDA1: P1.10
SDA2: P2.10
SDA3: P3.10
SDA4: P4.10
SDA5: P5.10
SDA6: P6.10
SDA7: P7.10
SDA8: P8.10
SDA9: P9.10
SDA10: P10.10
Sen1-3.3V: P1.1 P1.5 P1.8 P2.1 P2.5 P2.8 P3.1 P3.5 P3.8 P4.1 P4.5 P4.8 P5.1 P5.5 P5.8 Q12_SensorLED13.3
Sen2-3.3V: P6.1 P6.5 P6.8 P7.1 P7.5 P7.8 P8.1 P8.5 P8.8 P9.1 P9.5 P9.8 P10.1 P10.5 P10.8 Q12_SensorLED6.3
SH_CP_2: ArdPin1.6 SR_ShelfSR1.12 SR_ShelfSR2.12 SR_ShelfSR3.12 SR_ShelfSR4.12 SR_ShelfSR5.11
SH_CP_5: ArdPin1.3 SR1_Ch1.11 SR1_Ch2.11 SR1_Ch3.11 SR1_Ch4.11 SR1_Ch5.11 SR1_Ch6.11 SR1_Ch7.11 SR1_Ch8.11 SR1_Ch9.11 SR1_Ch10.11 SR_MotCtrl.11
ST_CP_3: ArdPin1.5 SR_ShelfSR1.11 SR_ShelfSR2.11 SR_ShelfSR3.11 SR_ShelfSR4.11 SR_ShelfSR5.12
ST_CP_6: ArdPin1.2 SR1_Ch1.12 SR1_Ch2.12 SR1_Ch3.12 SR1_Ch4.12 SR1_Ch5.12 SR1_Ch6.12 SR1_Ch7.12 SR1_Ch8.12 SR1_Ch9.12 SR1_Ch10.12 SR_MotCtrl.12
TCGND_Ch1: PHC_Ch1.5
TCGND_Ch2: PHC_Ch2.5
TCGND_Ch3: PHC_Ch3.5
TCGND_Ch4: PHC_Ch4.5
TCGND_Ch5: PHC_Ch5.5
TCGND_Ch6: PHC_Ch6.5
TCGND_Ch7: PHC_Ch7.5
TCGND_Ch8: PHC_Ch8.5
TCGND_Ch9: PHC_Ch9.5
TCGND_Ch10: PHC_Ch10.5
TCVCC_Ch1: JTC_Ch1.2 PHC_Ch1.6
TCVCC_Ch2: JTC_Ch2.2 PHC_Ch2.6
TCVCC_Ch3: JTC_Ch3.2 PHC_Ch3.6
TCVCC_Ch4: JTC_Ch4.2 PHC_Ch4.6
TCVCC_Ch5: JTC_Ch5.2 PHC_Ch5.6
TCVCC_Ch6: JTC_Ch6.2 PHC_Ch6.6
TCVCC_Ch7: JTC_Ch7.2 PHC_Ch7.6
TCVCC_Ch8: JTC_Ch8.2 PHC_Ch8.6
TCVCC_Ch9: JTC_Ch9.2 PHC_Ch9.6
TCVCC_Ch10: JTC_Ch10.2 PHC_Ch10.6
USBGND_Ch1: D6_Ch1.A D8_Ch1.A PHC_Ch1.7
USBGND_Ch2: D6_Ch2.A D8_Ch2.A PHC_Ch2.7
USBGND_Ch3: D6_Ch3.A D8_Ch3.A PHC_Ch3.7
USBGND_Ch4: D6_Ch4.A D8_Ch4.A PHC_Ch4.7
USBGND_Ch5: D6_Ch5.A D8_Ch5.A PHC_Ch5.7
USBGND_Ch6: D6_Ch6.A D8_Ch6.A PHC_Ch6.7
USBGND_Ch7: D6_Ch7.A D8_Ch7.A PHC_Ch7.7
USBGND_Ch8: D6_Ch8.A D8_Ch8.A PHC_Ch8.7
USBGND_Ch9: D6_Ch9.A D8_Ch9.A PHC_Ch9.7
USBGND_Ch10: D6_Ch10.A D8_Ch10.A PHC_Ch10.7
USBVCC_Ch1: JUSB_Ch1.2 PHC_Ch1.8
USBVCC_Ch2: JUSB_Ch2.2 PHC_Ch2.8
USBVCC_Ch3: JUSB_Ch3.2 PHC_Ch3.8
USBVCC_Ch4: JUSB_Ch4.2 PHC_Ch4.8
USBVCC_Ch5: JUSB_Ch5.2 PHC_Ch5.8
USBVCC_Ch6: JUSB_Ch6.2 PHC_Ch6.8
USBVCC_Ch7: JUSB_Ch7.2 PHC_Ch7.8
USBVCC_Ch8: JUSB_Ch8.2 PHC_Ch8.8
USBVCC_Ch9: JUSB_Ch9.2 PHC_Ch9.8
USBVCC_Ch10: JUSB_Ch10.2 PHC_Ch10.8
pads on no net: D1_Ch1.C D1_Ch2.C D1_Ch3.C D1_Ch4.C D1_Ch5.C D1_Ch6.C D1_Ch7.C D1_Ch8.C D1_Ch9.C D1_Ch10.C D2_Ch1.C D2_Ch2.C D2_Ch3.C D2_Ch4.C D2_Ch5.C D2_Ch6.C D2_Ch7.C D2_Ch8.C D2_Ch9.C D2_Ch10.C D3_Ch1.C D3_Ch2.C D3_Ch3.C D3_Ch4.C D3_Ch5.C D3_Ch6.C D3_Ch7.C D3_Ch8.C D3_Ch9.C D3_Ch10.C D4_Ch1.C D4_Ch2.C D4_Ch3.C D4_Ch4.C D4_Ch5.C D4_Ch6.C D4_Ch7.C D4_Ch8.C D4_Ch9.C D4_Ch10.C D5_Ch1.C D5_Ch2.C D5_Ch3.C D5_Ch4.C D5_Ch5.C D5_Ch6.C D5_Ch7.C D5_Ch8.C D5_Ch9.C D5_Ch10.C D6_Ch1.C D6_Ch2.C D6_Ch3.C D6_Ch4.C D6_Ch5.C D6_Ch6.C D6_Ch7.C D6_Ch8.C D6_Ch9.C D6_Ch10.C D7_Ch1.C D7_Ch2.C D7_Ch3.C D7_Ch4.C D7_Ch5.C D7_Ch6.C D7_Ch7.C D7_Ch8.C D7_Ch9.C D7_Ch10.C D8_Ch1.C D8_Ch2.C D8_Ch3.C D8_Ch4.C D8_Ch5.C D8_Ch6.C D8_Ch7.C D8_Ch8.C D8_Ch9.C D8_Ch10.C D11_HCFetG1.C D11_HCFetG2.C D11_HCFetG3.C D11_HCFetG4.C D11_HCFetG5.C D11_HCFetG6.C D11_HCFetG7.C D11_HCFetG8.C D11_HCFetG9.C D11_HCFetG10.C D12_HCFetV1.C D12_HCFetV2.C D12_HCFetV3.C D12_HCFetV4.C D12_HCFetV5.C D12_HCFetV6.C D12_HCFetV7.C D12_HCFetV8.C D12_HCFetV9.C D12_HCFetV10.C D14_SenIn1.C D14_SenIn2.C D14_SenIn3.C D14_SenIn4.C D14_SenIn5.C D14_SenIn6.C D14_SenIn7.C D14_SenIn8.C D14_SenIn9.C D14_SenIn10.C D15_SenIn1.C D15_SenIn2.C D15_SenIn3.C D15_SenIn4.C D15_SenIn5.C D15_SenIn6.C D15_SenIn7.C D15_SenIn8.C D15_SenIn9.C D15_SenIn10.C D16_SenIn1.C D16_SenIn2.C D16_SenIn3.C D16_SenIn4.C D16_SenIn5.C D16_SenIn6.C D16_SenIn7.C D16_SenIn8.C D16_SenIn9.C D16_SenIn10.C D17_SenIn1.C D17_SenIn2.C D17_SenIn3.C D17_SenIn4.C D17_SenIn5.C D17_SenIn6.C D17_SenIn7.C D17_SenIn8.C D17_SenIn9.C D17_SenIn10.C P1.12 P1.13 P1.14 P2.12 P2.13 P2.14 P3.12 P3.13 P3.14 P4.12 P4.13 P4.14 P5.12 P5.13 P5.14 P6.12 P6.13 P6.14 P7.12 P7.13 P7.14 P8.12 P8.13 P8.14 P9.12 P9.13 P9.14 P10.12 P10.13 P10.14